# Altium PCB Robot Control Board - save.PcbDoc (part 1 of 2)
Units mm, origin at the board's own origin, x right, y up, seen from the top; angles counter-clockwise.
Board outline 113.92 x 101.47 mm, 4 copper layers (Component Side, GND, VCC, Solder Side), stack 1.6 mm thick; 77 components, 60 nets, 315 pads, 76 vias.
Unrouted connection lines stored in the file: 4.
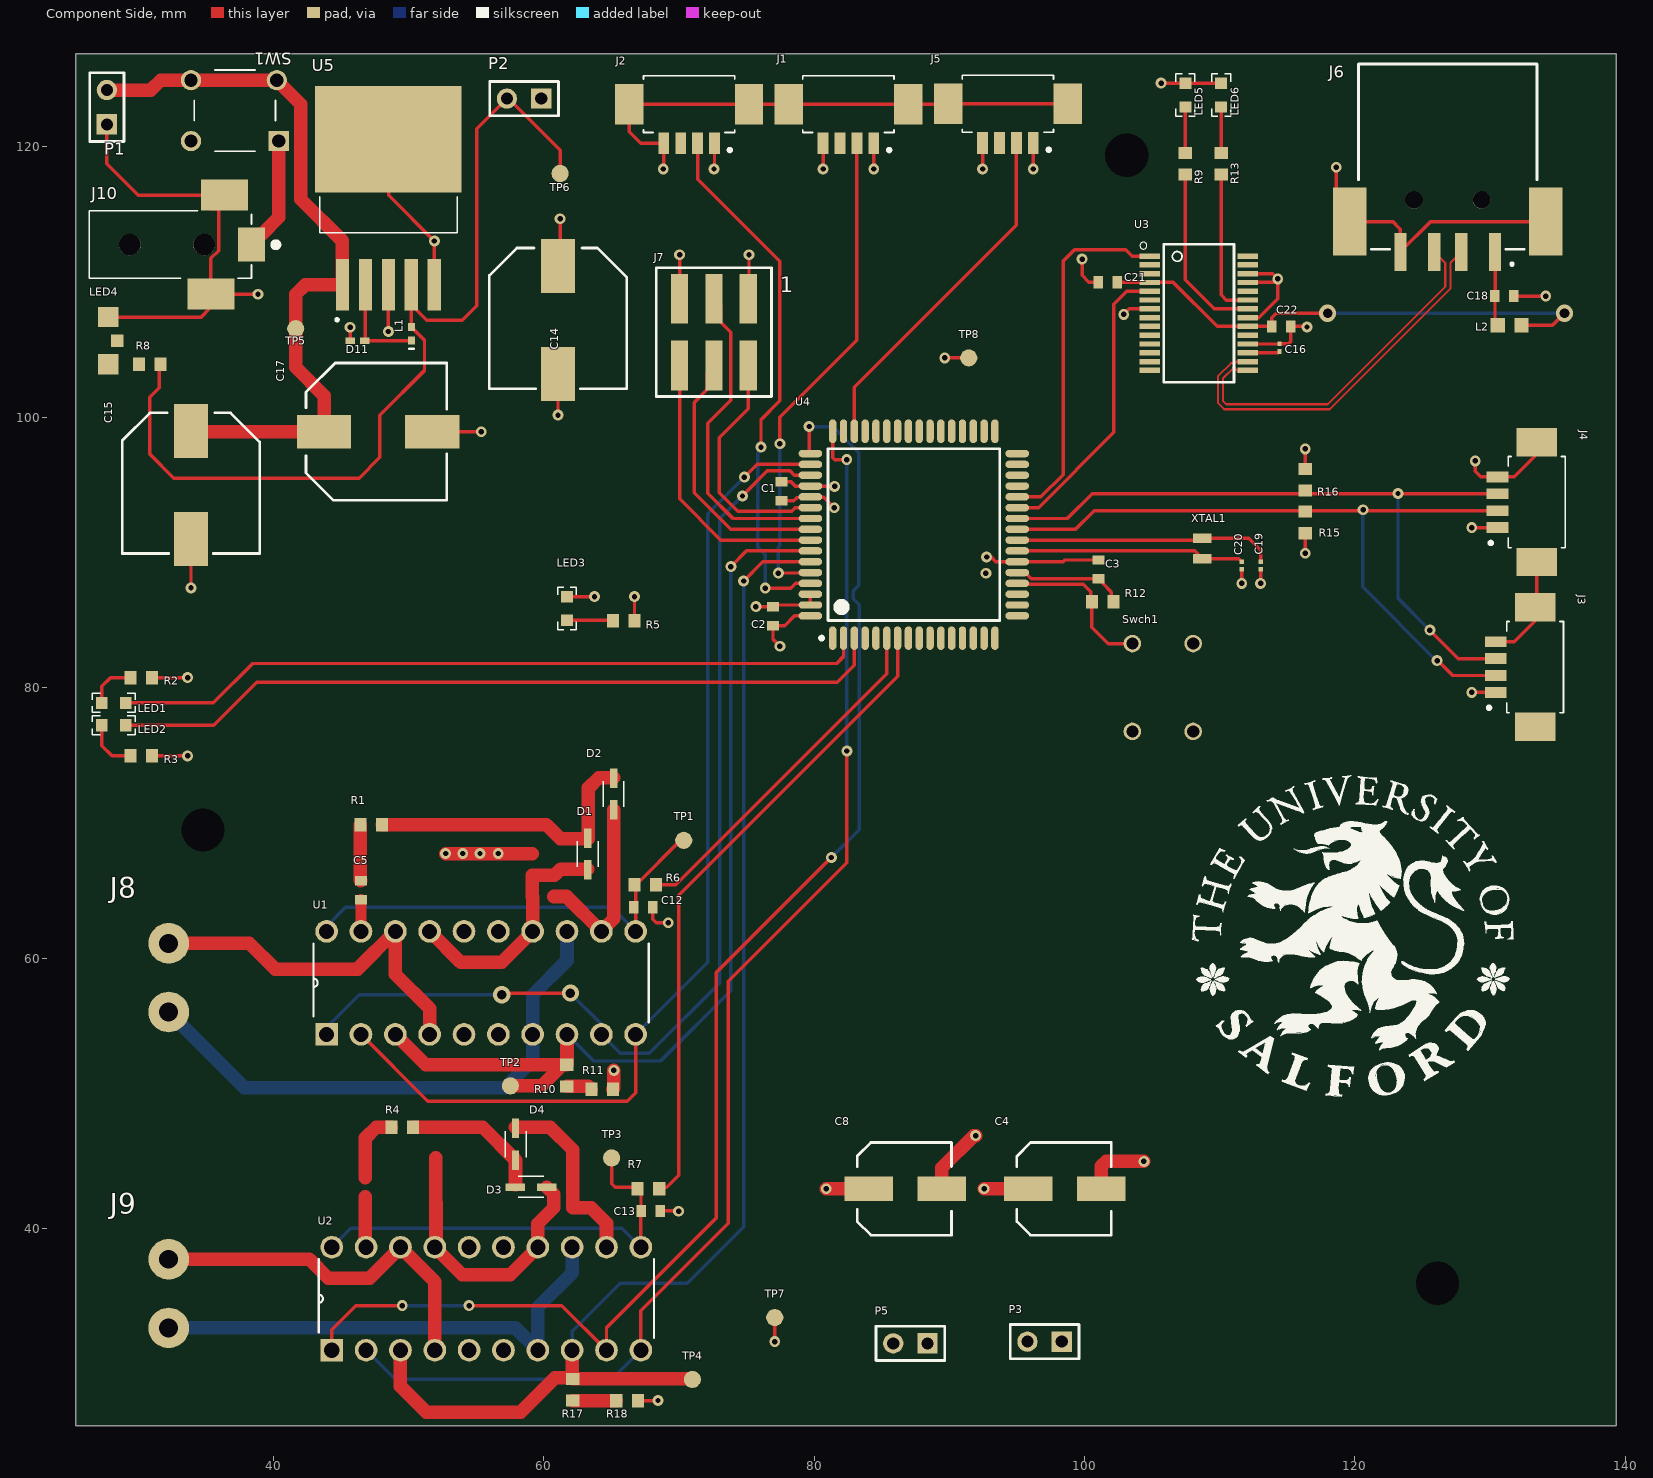
[diagram p0: Component Side view]
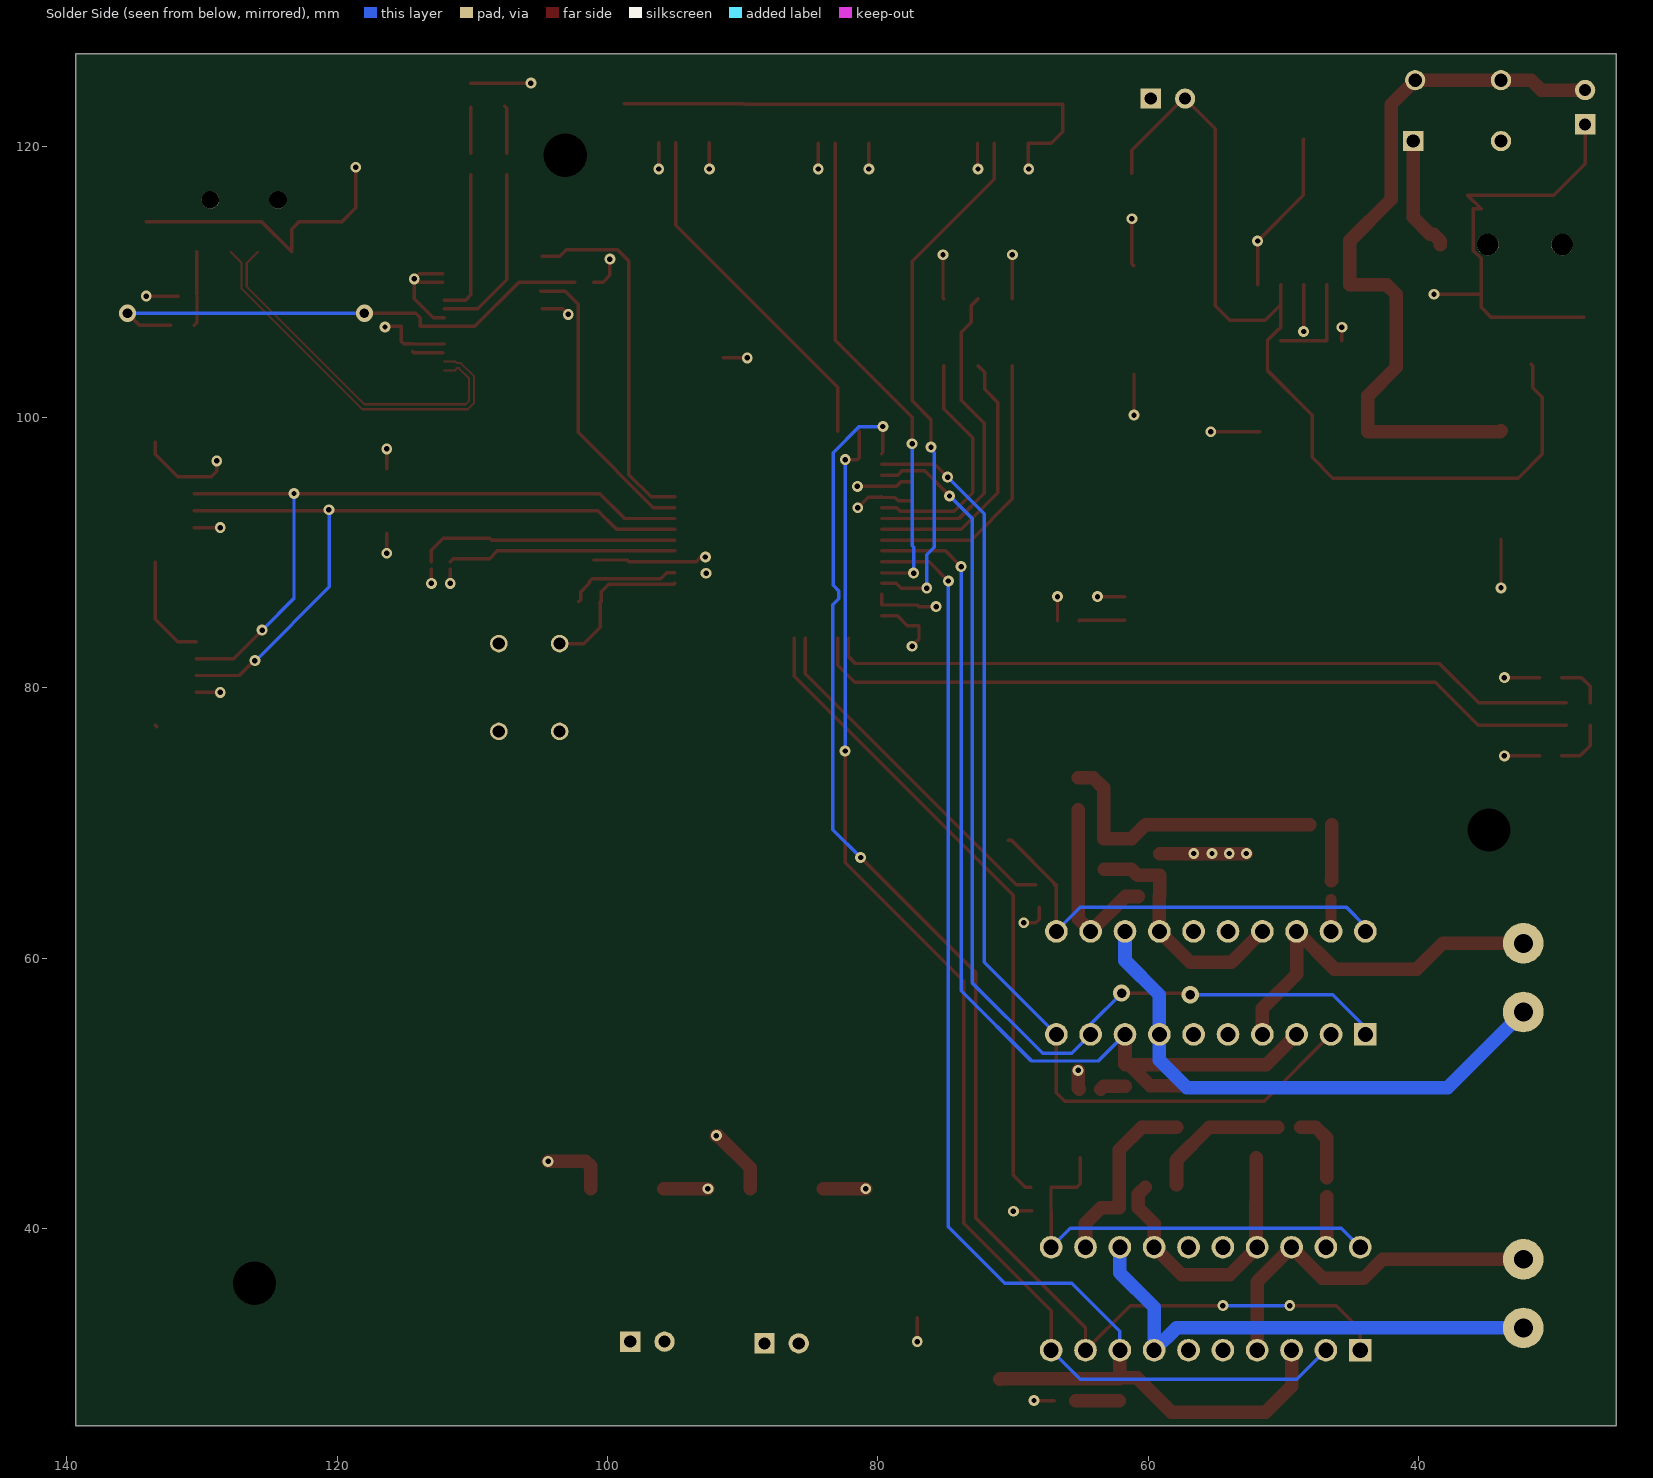
[diagram p1: Solder Side view, seen from below]
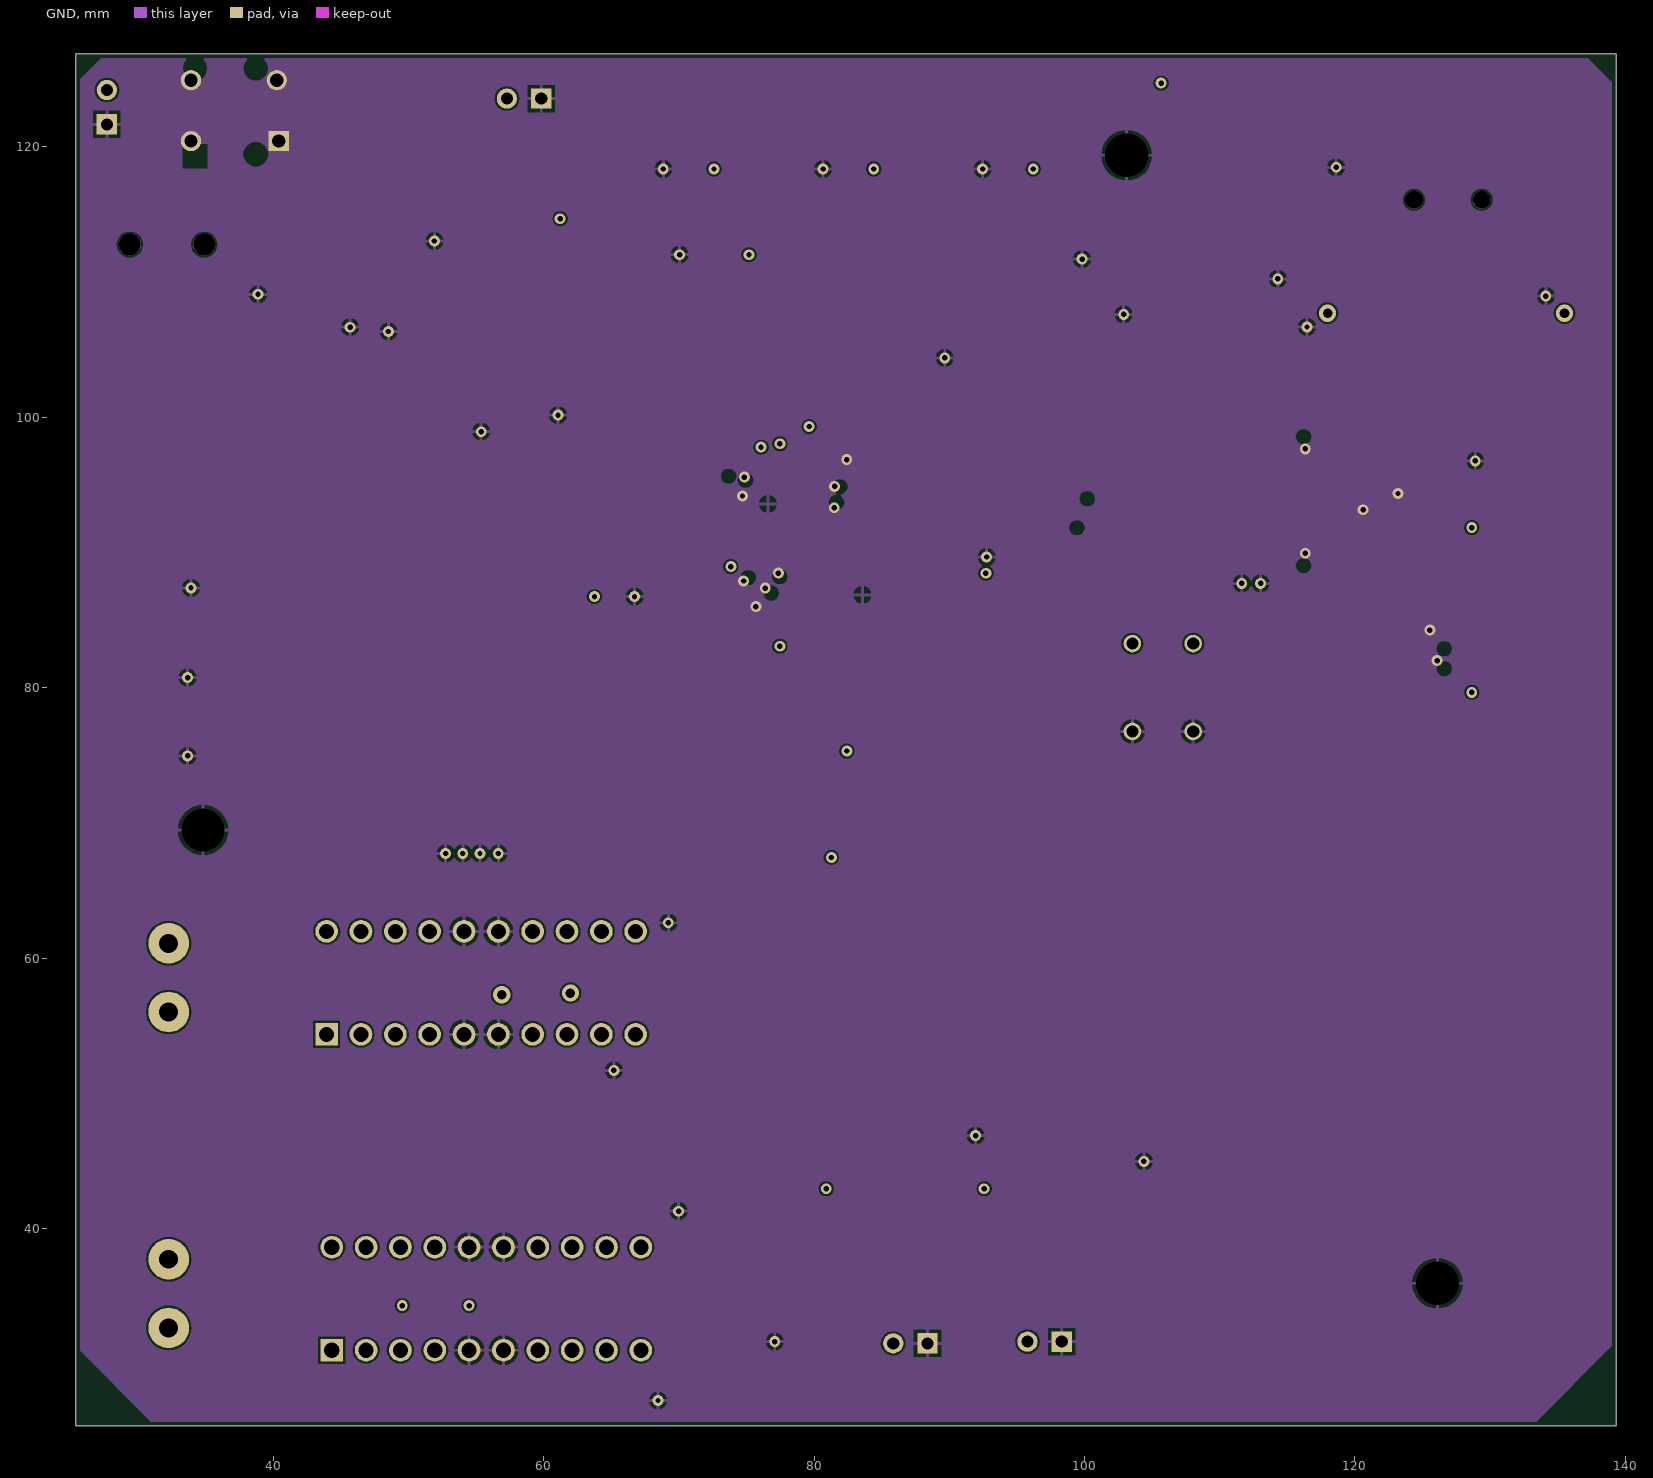
[diagram p2: GND]
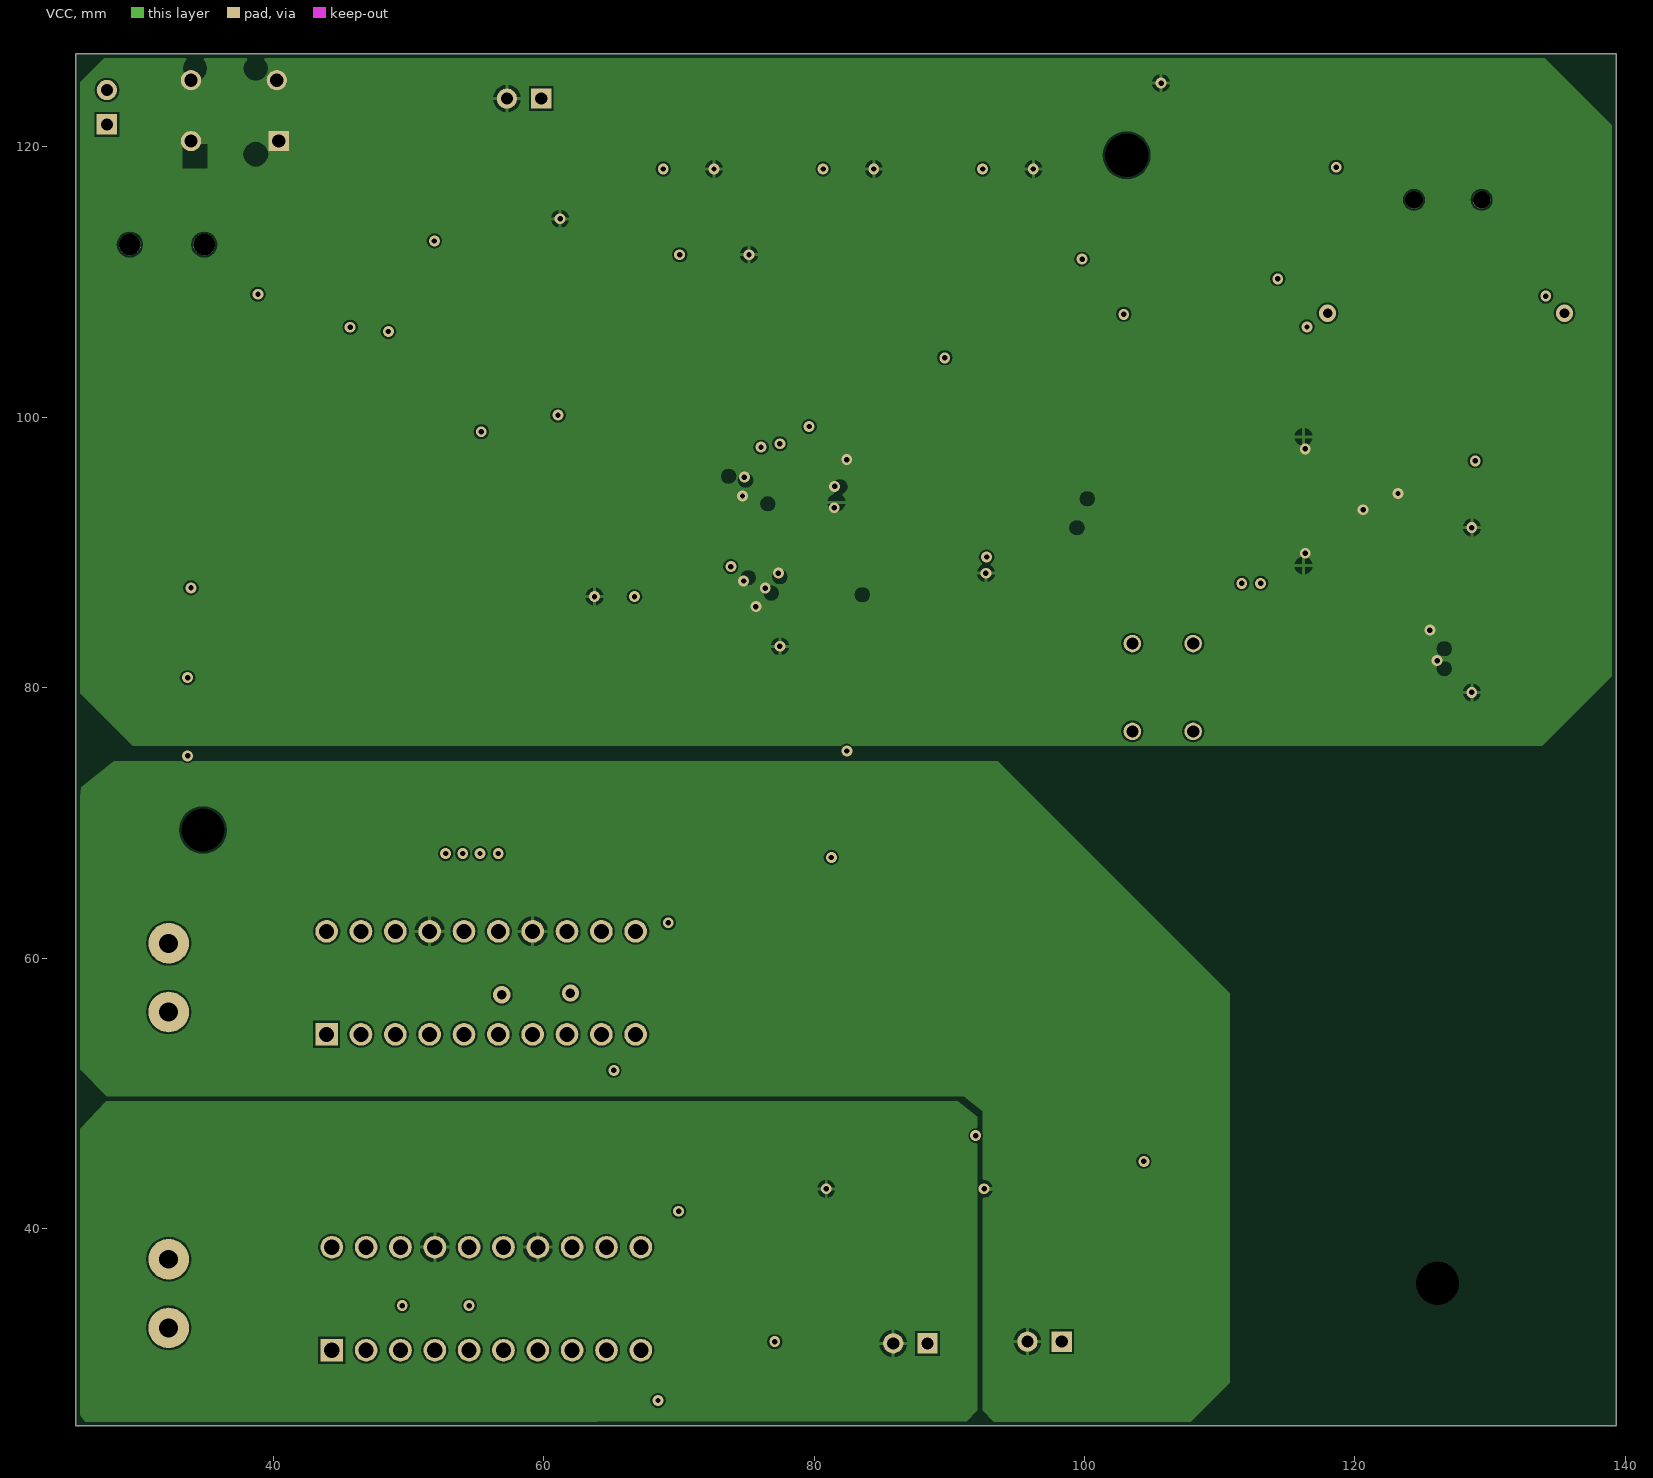
[diagram p3: VCC]
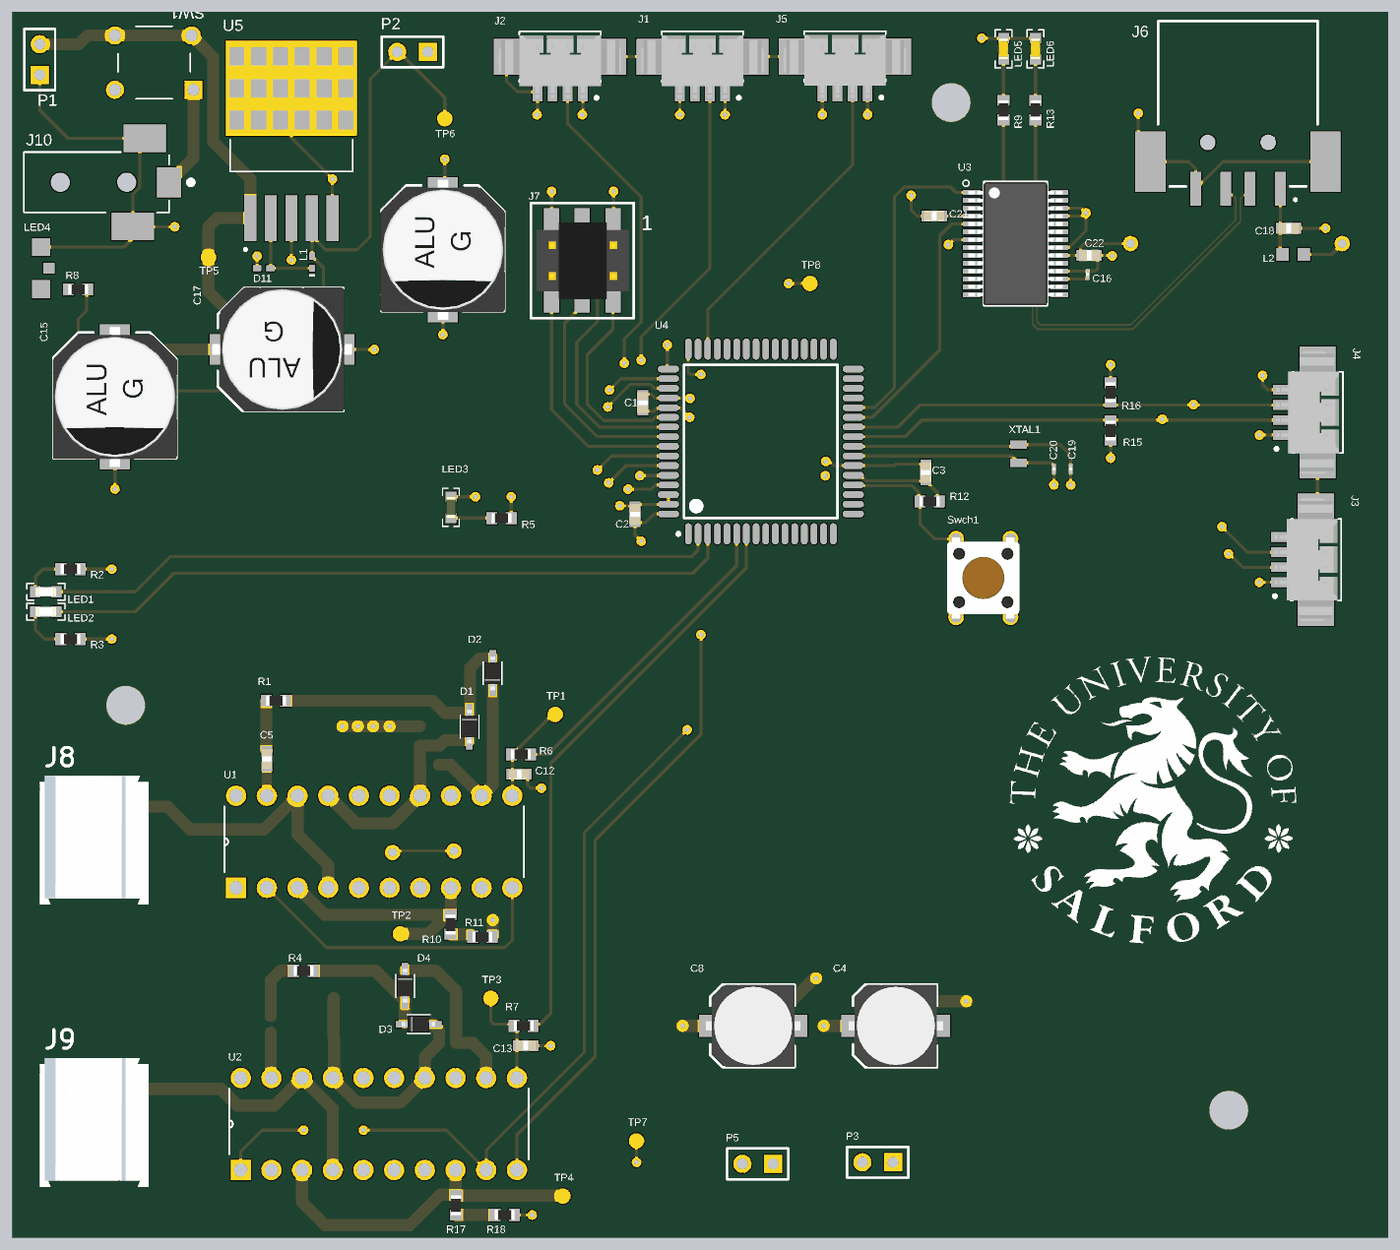
[diagram p4: 3D render of the assembled board from above, using the file's embedded part models]

## Layer stack, top to bottom
Top Solder: solder mask 0.02, Solder Resist, Dk 4
Component Side: signal copper 0.07
Dielectric 1: prepreg 0.13, Dk 4.45
GND: signal copper 0.0175
Dielectric 3: core 1.165, Dk 4.74
VCC: signal copper 0.0175
Dielectric 2: prepreg 0.13, Dk 4.45
Solder Side: signal copper 0.07
Bottom Solder: solder mask 0.02, Solder Resist, Dk 4

## Board outline
25.4,25.4 25.4,126.873 139.319,126.873 139.319,25.4

## Design rules (kind name [scope] priority, off if disabled: settings)
BoardOutlineClearance [All] p1: gap=0.3 ignorepadtopadclearanceinfootprint=FALSE
Clearance [All] p1: gap=0.15 ignorepadtopadclearanceinfootprint=FALSE
DiffPairsRouting [InDifferentialPairClass('USB')] p1: maxlimit=0.22 minlimit=0.22 mostfreqgap=0.22 toplayer_minwidth=0.154 toplayer_maxwidth=0.154 toplayer_prefwidth=0.154 midlayer1_minwidth=0.154 midlayer1_maxwidth=0.154 midlayer1_prefwidth=0.154 midlayer2_minwidth=0.154 midlayer2_maxwidth=0.154 midlayer2_prefwidth=0.154 bottomlayer_minwidth=0.154 bottomlayer_maxwidth=0.154 bottomlayer_prefwidth=0.154 maxuncoupledlength=12.7
PlaneConnect [All] p1: planeconnectstyle=Relief reliefexpansion=0.508 reliefentries=4 reliefconductorwidth=0.4 reliefairgap=0.254
PolygonConnect [All] p1: connectstyle=Relief reliefconductorwidth=0.254 reliefentries=4 polygonreliefangle="90 Angle" airgapwidth=0.254
RoutingVias [All] p1: holewidth=0.711 width=1.27 viastyle="Through Hole" minholewidth=0.711 minwidth=1.27 maxholewidth=0.711 maxwidth=1.27
SolderMaskExpansion [All] p1: expansion=0.102 istentingtop=FALSE
Width [All] p1: maxlimit=5 minlimit=0.15 preferedwidth=0.2
28 further rules are at their usual default settings.

## Classes and differential pairs
differential pair class USB: USB
component class UCU: C16 C18 C21 C22 J6 L2 LED5 LED6 R9 R13 U3
component class PSU: C14 C15 C17 D11 J J10 L1 LED4 P1 P2 R8 SW1 TP5 TP6 TP8 U5
component class MDU: C4 C5 C8 C12 C13 D1 D2 D3 D4 J8 J9 P3 P5 R1 R4 R6 R7 R10 R11 R17 R18 TP1 TP2 TP3 TP4 TP7 U1 U2
component class MCU: C1 C2 C3 C19 C20 J1 J2 J3 J4 J5 J7 LED1 LED2 LED3 R2 R3 R5 R12 R15 R16 Swch1 U4 XTAL1
differential pair USB: +USB_P -USB_N

## Components (designator, comment, footprint, x,y, rotation, side; value= is the part's Value field where it differs from the comment)
C1 "CAP" "CC0603 x 0.95mm" 77.597,94.514 r90 top value=100nF
C2 "CAP" "CC0603 x 0.95mm" 76.962,85.291 r270 top value=100nF
C3 "CAP" "CC0603 x 0.95mm" 101.027,88.743 r270 top value=100nF
C4 "Alu" UWT1V101MCL1GS 98.552,42.926 r90 top
C5 "CAP" "CC0603 x 0.87mm" 46.482,65.024 r270 top value=10nF
C8 "Alu" UWT1V101MCL1GS 86.741,42.926 r90 top
C12 "CAP" "CC0603 x 0.90mm" 67.362,63.754 r180 top value=5.6nF
C13 "CAP" "CC0603 x 0.90mm" 67.911,41.291 r180 top value=5.6nF
C14 "Alu" UUA0J471MNL1GS 61.056,107.188 r270 top
C15 "Alu" UUA0J471MNL1GS 33.909,94.996 r270 top
C16 "CAP" "CC0201 x 0.33mm" 114.427,105.156 r270 top value=100pF
C17 "Alu" UUA0J471MNL1GS 47.752,98.933 r0 top
C18 "CAP" "CC0603 x 0.95mm" 131.064,108.966 r180 top value=10nF
C19 "CAP" "CC0201 x 0.33mm" 113.03,89.034 r90 top value=22pF
C20 "CAP" "CC0201 x 0.33mm" 111.633,89.033 r90 top value=22pF
C21 "CAP" "CC0603 x 0.90mm" 101.727,109.982 r0 top value=100nF
C22 "CAP" "CC0603 x 0.95mm" 114.554,106.721 r180 top value=4.7µF
D1 "1N4148" SOD323 63.246,67.691 r270 top
D2 "1N4148" SOD323 65.187,72.136 r90 top
D3 "1N4148" SOD323 59.055,43.053 r0 top
D4 "1N4148" SOD323 57.912,46.228 r270 top
D11 "RB521S30" SOD523 46.228,105.664 r0 top
J1 "0532610471" MOLEX_0532610471 82.54,120.269 r180 top
J2 "0532610471" MOLEX_0532610471 70.759,120.269 r180 top
J3 "0532610471" MOLEX_0532610471 130.429,81.524 r90 top
J4 "0532610471" MOLEX_0532610471 130.556,93.716 r90 top
J5 "0532610471" MOLEX_0532610471 94.341,120.29 r180 top
J6 "USB-A-S-X-X-SM2" SAMTEC_USB-A-S-X-X-SM2 126.873,116.078 r180 top
J7 "SAMTEC-A-TSM-103-01-L-DVJ" SAMTEC-A-TSM-103-01-L-DV 72.594,106.299 r180 top
J8 "TERM BLOCK" 282841-2 32.258,61.087 r270 top
J9 "TERM BLOCK" 282841-2 32.258,37.719 r270 top
J10 "PJ1-022-SMT-TR" CUI_PJ1-022-SMT-TR 32.385,112.776 r0 top
L1 "Inductor" 0402-A 50.214,106.164 r90 top value=10mH
L2 "742792651" C0603K 131.445,106.807 r180 top
LED1 "Blue" "LED 0603 WHITE" 28.194,78.867 r0 top
LED2 "Blue" "LED 0603 WHITE" 28.194,77.217 r0 top
LED3 "Green" "LED 0603 GREEN" 61.722,85.859 r90 top
LED4 "KPA-3010CGCK" "KPA-3010 GREEN" 27.798,103.914 r90 top
LED5 "Orange" "LED 0603 ORANGE" 107.465,123.825 r90 top
LED6 "Orange" "LED 0603 ORANGE" 110.109,123.825 r90 top
P1 "Header 2" HDR1X2 27.686,121.666 r90 top
P2 "Header 2" HDR1X2 59.817,123.571 r180 top
P3 "Header 2" HDR1X2 98.321,31.623 r180 top
P5 "Header 2" HDR1X2 88.392,31.496 r180 top
R1 "RES" RESC0603_N 47.244,69.85 r180 top value=100
R2 "RES" RESC0603_N 30.226,80.742 r180 top value=150
R3 "RES" RESC0603_N 30.226,74.952 r180 top value=150
R4 "RES" RESC0603_N 49.53,47.48 r180 top value=100
R5 "RES" RESC0603_N 65.913,84.963 r180 top value=270
R6 "RES" RESC0603_N 67.514,65.405 r0 top value=100K
R7 "RES" RESC0603_N 67.743,42.926 r0 top value=100K
R8 "RES" RESC0603_N 30.861,103.914 r0 top value=270
R9 "RES" RESC0603_N 107.465,118.745 r90 top value=270
R10 "RES" RESC0603_N 61.687,51.308 r90 top value=0.15
R11 "RES" RESC0603_N 64.323,50.292 r180 top value=0.15
R12 "RES" RESC0603_N 101.346,86.344 r0 top value=130
R13 "RES" RESC0603_N 110.109,118.745 r90 top value=270
R15 "RES" RESC0603_N 116.332,92.222 r270 top value=1.60K
R16 "RES" RESC0603_N 116.332,95.377 r90 top value=1.60K
R17 "RES" RESC0603_N 62.142,28.067 r90 top value=0.15
R18 "RES" RESC0603_N 66.167,27.267 r180 top value=0.15
SW1 "3-1825910-1" TE_3-1825910-1 37.159,122.682 r180 top
Swch1 "Tactile Switch" "Tactile Switch - 1825910_6" 105.791,80.01 r90 top
TP1 "TEST_POINT_1.27mm" Test_Point1.27mm 70.358,68.707 r90 top
TP2 "TEST_POINT_1.27mm" Test_Point1.27mm 57.531,50.546 r90 top
TP3 "TEST_POINT_1.27mm" Test_Point1.27mm 65.024,45.212 r90 top
TP4 "TEST_POINT_1.27mm" Test_Point1.27mm 70.993,28.829 r90 top
TP5 "TEST_POINT_1.27mm" Test_Point1.27mm 41.656,106.553 r90 top
TP6 "TEST_POINT_1.27mm" Test_Point1.27mm 61.214,118.033 r90 top
TP7 "TEST_POINT_1.27mm" Test_Point1.27mm 77.089,33.401 r90 top
TP8 "TEST_POINT_1.27mm" Test_Point1.27mm 91.44,104.394 r90 top
U1 "L6205N" DIP254P762X510-20 66.802,61.976 r90 top
U2 "L6205N" DIP254P762X510-20 67.183,38.608 r90 top
U3 "FT232RL-REEL" SOP65P780X200-28N 108.458,107.696 r0 top
U4 "ATmega128A-AU" 64A_N 87.376,91.313 r90 top
U5 "LM2596S-5.0" TO170P1524X483-6N 48.514,116.209 r90 top
XTAL1 "Crystal FC12M" PCBComponent_1 108.712,90.297 r90 top

## Footprints (in the part's own frame and the unit in brackets; to place one, negate y for a bottom-side part, rotate by r counter-clockwise, add the part's x,y. Pads: shape width x height; smd on the part's side, far side on the other; paste and mask are expansions set on the pad)
64A_N [mm] "Thin QFP, 64-Leads, Body 14x14mm, Pitch 0.8mm, IPC Medium Density"
  oval 1.75x0.55 smd: 1(-7.65,6) 2(-7.65,5.2) 3(-7.65,4.4) 4(-7.65,3.6) 5(-7.65,2.8) 6(-7.65,2) 7(-7.65,1.2) 8(-7.65,0.4) 9(-7.65,-0.4) 10(-7.65,-1.2) 11(-7.65,-2) 12(-7.65,-2.8) 13(-7.65,-3.6) 14(-7.65,-4.4) 15(-7.65,-5.2) 16(-7.65,-6) 33(7.65,-6) 34(7.65,-5.2) 35(7.65,-4.4) 36(7.65,-3.6) 37(7.65,-2.8) 38(7.65,-2) 39(7.65,-1.2) 40(7.65,-0.4) 41(7.65,0.4) 42(7.65,1.2) 43(7.65,2) 44(7.65,2.8) 45(7.65,3.6) 46(7.65,4.4) 47(7.65,5.2) 48(7.65,6)
  oval 0.55x1.75 smd: 17(-6,-7.65) 18(-5.2,-7.65) 19(-4.4,-7.65) 20(-3.6,-7.65) 21(-2.8,-7.65) 22(-2,-7.65) 23(-1.2,-7.65) 24(-0.4,-7.65) 25(0.4,-7.65) 26(1.2,-7.65) 27(2,-7.65) 28(2.8,-7.65) 29(3.6,-7.65) 30(4.4,-7.65) 31(5.2,-7.65) 32(6,-7.65) 49(6,7.65) 50(5.2,7.65) 51(4.4,7.65) 52(3.6,7.65) 53(2.8,7.65) 54(2,7.65) 55(1.2,7.65) 56(0.4,7.65) 57(-0.4,7.65) 58(-1.2,7.65) 59(-2,7.65) 60(-2.8,7.65) 61(-3.6,7.65) 62(-4.4,7.65) 63(-5.2,7.65) 64(-6,7.65)
  silkscreen extent -7.77,-6.35 6.35,6.95, body extent -7,-7 7,7, height 1.2
0402-A [mm] "Chip Inductor, Body 1.0x0.5mm, IPC High Density"
  rect 0.6x0.5 smd: 1(-0.5,0) 2(0.5,0)
  silkscreen extent -1.1,-0.15 -1.1,0.15, body extent -0.55,-0.3 0.55,0.3, height 0.55
282841-2 [mm] "TERM BLOCK 2POS SIDE ENT 5.08MM"
  round 3 hole 1.4: 1(0,0) 2(5.08,0)
  body extent -2.54,-4.57 8.12,4.43, height 15.2
C0603K [mm]
  rect 1.05x1.08 smd: 1(-0.875,0) 2(0.875,0)
"CC0201 x 0.33mm" [mm] "CC0201 0.33 max Thickness"
  rect 0.36x0.32 smd mask+0.025: 1(-0.28,0) 2(0.28,0)
  body extent -0.31,-0.16 0.32,0.17, height 0.32
"CC0603 x 0.87mm" [mm] "CC0603 0.87 max Thickness"
  rect 0.7x0.9 smd: 1(-0.7,0) 2(0.7,0)
  body extent -0.85,-0.45 0.85,0.45, height 0.86
"CC0603 x 0.90mm" [mm] "CC0603 0.90 max Thickness"
  rect 0.7x0.9 smd: 1(-0.7,0) 2(0.7,0)
  body extent -0.85,-0.45 0.85,0.45, height 0.89
"CC0603 x 0.95mm" [mm] "CC0603 0.95 max Thickness"
  rect 0.7x0.9 smd: 1(-0.7,0) 2(0.7,0)
  body extent -0.87,-0.47 0.88,0.48, height 0.94
CUI_PJ1-022-SMT-TR [mm]
  rect 2x2.5 smd: 1(6,0)
  rect 3.5x2.3 smd: 2(3,-3.65) 3(4,3.65)
  round 1.6 hole 1.6 unplated: ""(-3,0) ""(2.5,0)
  silkscreen extent -6,-2.5 8,2.5
DIP254P762X510-20 [mil]
  rect 66x66 hole 44: 1(-300,900)
  round 66 hole 44: 2(-300,800) 3(-300,700) 4(-300,600) 5(-300,500) 6(-300,400) 7(-300,300) 8(-300,200) 9(-300,100) 10(-300,0) 11(0,0) 12(0,100) 13(0,200) 14(0,300) 15(0,400) 16(0,500) 17(0,600) 18(0,700) 19(0,800) 20(0,900)
  silkscreen extent -265,-38 -35,938
HDR1X2 [mm] "Connector; Header; 2 Position"
  rect 1.5x1.5 hole 0.9: 1(0,0)
  round 1.5 hole 0.9: 2(2.54,0)
  silkscreen extent -1.27,-1.27 3.81,1.27
"KPA-3010 GREEN" [mm] "3.0x2x1mm Right Angle LED"
  rect 1.5x1.5 smd: 1(3.5,0) 2(0,0)
  rect 0.9x0.9 smd: 3(1.75,-0.65)
  body extent 0.25,-0.48 3.25,1.38, height 1
"LED 0603 GREEN" [mm] "0603 CHIP-LED"
  rect 0.85x0.9 smd: 1(-0.875,0) 2(0.875,0)
  silkscreen extent -1.58,-0.7 1.58,0.7, body extent -0.85,-0.4 0.85,0.4, height 0.65
"LED 0603 ORANGE" [mm] "0603 CHIP-LED"
  rect 0.85x0.9 smd: 1(-0.875,0) 2(0.875,0)
  silkscreen extent -1.58,-0.7 1.58,0.7, body extent -0.85,-0.4 0.85,0.4, height 0.65
"LED 0603 WHITE" [mm] "0603 CHIP-LED"
  rect 0.85x0.9 smd: 1(-0.875,0) 2(0.875,0)
  silkscreen extent -1.58,-0.7 1.58,0.7, body extent -0.85,-0.4 0.85,0.4, height 0.65
MOLEX_0532610471 [mm]
  rect 0.8x1.6 smd: 1(-1.875,0) 2(-0.625,0) 3(0.625,0) 4(1.875,0)
  rect 2.1x3 smd: S1(-4.425,-2.9) S2(4.425,-2.9)
  silkscreen extent -3.37,-5 3.37,0.62, body extent -5.08,-4.68 5.07,0.52, height 3.35
PCBComponent_1 [mm]
  rect 0.7x1.4 smd: 1(-0.75,0) 2(0.75,0)
RESC0603_N [mm] "Chip Resistor, Body 1.6x0.8mm, IPC Medium Density"
  rect 0.9x1 smd: 1(-0.8,0) 2(0.8,0)
  body extent -0.82,-0.42 0.82,0.42, height 0.5
SAMTEC-A-TSM-103-01-L-DV [mm]
  rect 1.27x3.68 smd: 1(-2.54,-2.476) 2(-2.54,2.476) 3(0,-2.476) 4(0,2.476) 5(2.54,-2.476) 6(2.54,2.476)
  silkscreen extent -4.26,-4.77 4.26,4.77, body extent -3.85,-3.83 3.77,3.87, height 9.65
SAMTEC_USB-A-S-X-X-SM2 [mm]
  rrect4% 0.9x2.8 smd: 01(-3.5,3.85) 02(-1,3.85) 03(1,3.85) 04(3.5,3.85)
  rect 2.5x5 smd: S1(-7.25,1.6) S2(7.25,1.6)
  round 1.3 hole 1.3 unplated: ""(-2.5,0) ""(2.5,0)
  silkscreen extent -6.6,-10.05 6.6,4.85
SOD323 [mm] "SOD-323/SC-76; 2 Leads; Body 1.7 x 1.3 mm, (LxW)"
  rect 1.45x0.55 smd: 1(1.175,0) 2(-1.175,0)
  silkscreen extent -0.95,-0.75 0.95,0.8, body extent -1.42,-0.66 1.38,0.69, height 1.15
SOD523 [mm]
  rect 0.7x0.5 smd: 1(0.55,0) 2(-0.55,0)
SOP65P780X200-28N [mm]
  rect 1.5x0.4 smd: 1(-3.625,4.225) 2(-3.625,3.575) 3(-3.625,2.925) 4(-3.625,2.275) 5(-3.625,1.625) 6(-3.625,0.975) 7(-3.625,0.325) 8(-3.625,-0.325) 9(-3.625,-0.975) 10(-3.625,-1.625) 11(-3.625,-2.275) 12(-3.625,-2.925) 13(-3.625,-3.575) 14(-3.625,-4.225) 15(3.625,-4.225) 16(3.625,-3.575) 17(3.625,-2.925) 18(3.625,-2.275) 19(3.625,-1.625) 20(3.625,-0.975) 21(3.625,-0.325) 22(3.625,0.325) 23(3.625,0.975) 24(3.625,1.625) 25(3.625,2.275) 26(3.625,2.925) 27(3.625,3.575) 28(3.625,4.225)
  silkscreen extent -4.35,-5.1 2.6,5.25, body extent -3.9,-5.1 3.9,5.1, height 2
"Tactile Switch - 1825910_6" [mm]
  round 1.3 hole 0.9: 1(3.25,2.25) 2(3.25,-2.25) 3(-3.25,2.25) 4(-3.25,-2.25)
  body extent -3.9,-2.99 3.9,3, height 5
TE_3-1825910-1 [mm]
  rect 1.498x1.498 hole 0.99: 1(-3.25,2.25)
  round 1.498 hole 0.99: 2(3.25,2.25) 3(-3.1,-2.25) 4(3.25,-2.25)
  silkscreen extent -3,-3 3,3
Test_Point1.27mm [mm]
  round 1.27 smd paste-2: 1(0,0)
  body extent -0.63,-0.63 0.64,0.63, height 0.01
TO170P1524X483-6N [mm]
  rect 3.79x0.99 smd: 1(-6.4,3.4) 2(-6.4,1.7) 3(-6.4,0) 4(-6.4,-1.7) 5(-6.4,-3.4)
  rect 7.88x10.84 smd paste-6: 6(4.35,0)
  silkscreen extent -9.1,-5.08 0.09,5.08
UUA0J471MNL1GS [mm] "Aluminum Electrolytic Capacitor, Body 10.30x10.30x10mm, IPC High Density"
  rect 4x2.5 smd: 1(-4,0) 2(4,0)
  silkscreen extent -5.33,-5.08 5.08,5.08, body extent -5.8,-5.15 5.8,5.15, height 10.2
UWT1V101MCL1GS [mm]
  rect 1.8x3.6 smd: 1(0,2.7) 2(0,-2.7)
  silkscreen extent -3.43,-3.43 3.43,3.56, body extent -3.4,-3.9 3.4,3.9, height 8.05

## Part data
C1 C2 C3: library part CS0603KRX7R0BB104, "0.1µF ±10% 100V Ceramic Capacitor X7R 0603 (1608 Metric)", Capacitance=0.1µF, Digi-Key Part Number=311-3555-2-ND, manufacturer=Yageo, Manufacturer Standard Lead Time="17 Weeks", Normalized value µF=0.1, Operating Temperature="-55°C ~ 125°C", Package / Case="0603 (1608 Metric)", Package Inch=0603, Package Metric=1608, Ratings=-, Temperature Coefficient=X7R, Tolerance=±10%, Voltage - Rated=100V, Applications="Boardflex Sensitive", ComponentLink1URL=http://www.yageo.com/NewPortal/yageodocoutput?fileName=/pdf/MLCC/UPY-ST_NPOX7R_16V-to-3KV_5.pdf, currency=USD, Failure Rate=-, Features="Soft Termination", Height - Seated (Max)=-, idx=2943, Lead Free Status / RoHS Status="Lead free / ROHS3 Compliant", Lead Spacing=-, Lead Style=-, Length Inch=0.063, Length mm=1.60, Moisture Sensitivity Level (MSL)="1  (Unlimited)", Mounting Type="Surface Mount, MLCC", Packaging="Tape & Reel (TR)", Part Number=CS0603KRX7R0BB104, Part Status=Active, ProductLink=https://www.digikey.com/product-detail/en/yageo/CS0603KRX7R0BB104/311-3555-2-ND/6097976, Series=CS, Size / Dimension="0.063\" L x 0.031\" W (1.60mm x 0.80mm)", Thickness (Max)="0.037\" (0.95mm)", Thickness Inch=0.037, Thickness mm=0.95, Width Inch=0.031, Width mm=0.80
C4 C8: library part UWT1V101MCL1GS, "CAP ALUM 100UF 20% 35V SMD", Avnet Part Number=NCHUWT1V101MCL1GS, Capacitance=100µF, manufacturer=Nichicon, Voltage=35V, currency=EUR, MOQ=18000, Part Number=UWT1V101MCL1GS, Price=0.0452
C5: library part C0603C103G8GAC7867, "10000pF ±2% 10V Ceramic Capacitor C0G, NP0 0603 (1608 Metric)", Capacitance=10000pF, Digi-Key Part Number=399-14481-2-ND, manufacturer=KEMET, Manufacturer Standard Lead Time="54 Weeks", Normalized value µF=0.01, Operating Temperature="-55°C ~ 125°C", Package / Case="0603 (1608 Metric)", Package Inch=0603, Package Metric=1608, Ratings=-, Temperature Coefficient="C0G, NP0", Tolerance=±2%, Voltage - Rated=10V, Applications="General Purpose", ComponentLink1URL=https://api.kemet.com/component-edge/download/datasheet/C0603C103G8GACTU.pdf, currency=USD, Failure Rate=-, Features="Low ESL", Height - Seated (Max)=-, idx=6156, Lead Free Status / RoHS Status="Lead free / ROHS3 Compliant", Lead Spacing=-, Lead Style=-, Length Inch=0.063, Length mm=1.60, Moisture Sensitivity Level (MSL)="1  (Unlimited)", Mounting Type="Surface Mount, MLCC", Packaging="Tape & Reel (TR)", Part Number=C0603C103G8GAC7867, Part Status=Active, ProductLink=https://www.digikey.com/product-detail/en/kemet/C0603C103G8GAC7867/399-14481-2-ND/2199740, Series="SMD Comm C0G", Size / Dimension="0.063\" L x 0.031\" W (1.60mm x 0.80mm)", Thickness (Max)="0.034\" (0.87mm)", Thickness Inch=0.034, Thickness mm=0.87, Width Inch=0.031, Width mm=0.80
C12 C13: library part CC0603JRX7R9BB562, "5600pF ±5% 50V Ceramic Capacitor X7R 0603 (1608 Metric)", Capacitance=5600pF, Digi-Key Part Number=311-4021-2-ND, manufacturer=Yageo, Manufacturer Standard Lead Time="17 Weeks", Normalized value µF=0.0056, Operating Temperature="-55°C ~ 125°C", Package / Case="0603 (1608 Metric)", Package Inch=0603, Package Metric=1608, Ratings=-, Temperature Coefficient=X7R, Tolerance=±5%, Voltage - Rated=50V, Applications="General Purpose", ComponentLink1URL=https://www.yageo.com/upload/media/product/productsearch/datasheet/mlcc/UPY-GPHC_X7R_6.3V-to-50V_18.pdf, currency=USD, Failure Rate=-, Features=-, Height - Seated (Max)=-, idx=31442, Lead Free Status / RoHS Status="Lead free / ROHS3 Compliant", Lead Spacing=-, Lead Style=-, Length Inch=0.063, Length mm=1.60, Moisture Sensitivity Level (MSL)="1  (Unlimited)", Mounting Type="Surface Mount, MLCC", Packaging="Tape & Reel (TR)", Part Number=CC0603JRX7R9BB562, Part Status=Active, ProductLink=https://www.digikey.com/product-detail/en/yageo/CC0603JRX7R9BB562/311-4021-2-ND/5883696, Series=CC, Size / Dimension="0.063\" L x 0.031\" W (1.60mm x 0.80mm)", Thickness (Max)="0.035\" (0.90mm)", Thickness Inch=0.035, Thickness mm=0.90, Width Inch=0.031, Width mm=0.80
C14 C15 C17: library part UUA1E221MNL1GS, "CAP ALUM 220UF 20% 25V SMD", Capacitance=220uF, Case/Package=Radial, Leakage Current=55uA, manufacturer=Nichicon, Max Operating Temperature=105°C, Package Quantity=1, Ripple Current=320mA, Supplier Part Number 1=493-9451-1-ND, Tolerance=20%, Voltage Rating=25V, ComponentLink1Description=https://datasheet.ciiva.com/15036/e-ua-15036879.pdf?src-supplier=Digi-Key, ComponentLink1URL=https://datasheet.ciiva.com/15036/e-ua-15036879.pdf?src-supplier=Digi-Key, Features="General Purpose", Height - Seated (Max)=0.394inch, Length=10mm, Life (Hours)=5000Hour, Mount="Surface Mount", Packaging="Tape and Reel", Part Number=UUA1E221MNL1GS, Pricing 1="1=0,91000, 10=0,69200, 100=0,49490 (USD)", RoHS=Yes, Stock 1=716, Supplier 1=Digi-Key, Termination=SMD/SMT, Voltage Rating (DC)=25V
C16: library part GRM0335C1H101GA01D, "100pF ±2% 50V Ceramic Capacitor C0G, NP0 0201 (0603 Metric)", Capacitance=100pF, Digi-Key Part Number=490-7751-2-ND, manufacturer="Murata Electronics", Manufacturer Standard Lead Time="11 Weeks", Normalized value µF=0.0001, Operating Temperature="-55°C ~ 125°C", Package / Case="0201 (0603 Metric)", Package Inch=0201, Package Metric=0603, Ratings=-, Temperature Coefficient="C0G, NP0", Tolerance=±2%, Voltage - Rated=50V, Applications="General Purpose", ComponentLink1Description=Datasheet, ComponentLink1URL=https://search.murata.co.jp/Ceramy/image/img/A01X/G101/ENG/GRM0335C1H101GA01-01.pdf, currency=USD, Features=-, Height - Seated (Max)=-, idx=118, Lead Free Status / RoHS Status="Lead free / ROHS3 Compliant", Lead Spacing=-, Lead Style=-, Length Inch=0.024, Length mm=0.60, Moisture Sensitivity Level (MSL)="1  (Unlimited)", Mounting Type="Surface Mount, MLCC", Packaging="Tape & Reel (TR)", Part Number=GRM0335C1H101GA01D, Part Status=Active, ProductLink=https://www.digikey.com/product-detail/en/murata-electronics/GRM0335C1H101GA01D/490-7751-2-ND/4358135, Series=GRM, Size / Dimension="0.024\" L x 0.012\" W (0.60mm x 0.30mm)", Thickness (Max)="0.013\" (0.33mm)", Thickness Inch=0.013, Thickness mm=0.33, Width Inch=0.012, Width mm=0.30
C18: library part CS0603KRX7R7BB103, "10000pF ±10% 16V Ceramic Capacitor X7R 0603 (1608 Metric)", Capacitance=10000pF, Digi-Key Part Number=CS0603KRX7R7BB103-ND, manufacturer=Yageo, Manufacturer Standard Lead Time="17 Weeks", Normalized value µF=0.01, Operating Temperature="-55°C ~ 125°C", Package / Case="0603 (1608 Metric)", Package Inch=0603, Package Metric=1608, Ratings=-, Temperature Coefficient=X7R, Tolerance=±10%, Voltage - Rated=16V, Applications="Boardflex Sensitive", ComponentLink1URL=http://www.yageo.com/NewPortal/yageodocoutput?fileName=/pdf/MLCC/UPY-ST_NPOX7R_16V-to-3KV_5.pdf, currency=USD, Failure Rate=-, Features="Soft Termination", Height - Seated (Max)=-, idx=48811, Lead Free Status / RoHS Status="Lead free / ROHS3 Compliant", Lead Spacing=-, Lead Style=-, Length Inch=0.063, Length mm=1.60, Moisture Sensitivity Level (MSL)="1  (Unlimited)", Mounting Type="Surface Mount, MLCC", Packaging="Tape & Reel (TR)", Part Number=CS0603KRX7R7BB103, Part Status=Active, ProductLink=https://www.digikey.com/product-detail/en/yageo/CS0603KRX7R7BB103/CS0603KRX7R7BB103-ND/6097905, Series=CS, Size / Dimension="0.063\" L x 0.031\" W (1.60mm x 0.80mm)", Thickness (Max)="0.037\" (0.95mm)", Thickness Inch=0.037, Thickness mm=0.95, Width Inch=0.031, Width mm=0.80
C19 C20: library part CC0201GRNPO9BN220, "22pF ±2% 50V Ceramic Capacitor C0G, NP0 0201 (0603 Metric)", Capacitance=22pF, Digi-Key Part Number=311-3681-2-ND, manufacturer=Yageo, Manufacturer Standard Lead Time="17 Weeks", Normalized value µF=2.2E-5, Operating Temperature="-55°C ~ 125°C", Package / Case="0201 (0603 Metric)", Package Inch=0201, Package Metric=0603, Ratings=-, Temperature Coefficient="C0G, NP0", Tolerance=±2%, Voltage - Rated=50V, Applications="General Purpose", ComponentLink1Description=Datasheet, ComponentLink1URL=https://www.yageo.com/upload/media/product/productsearch/datasheet/mlcc/UPY-GP_NP0_16V-to-50V_17.pdf, currency=USD, Failure Rate=-, Features=-, Height - Seated (Max)=-, idx=21136, Lead Free Status / RoHS Status="Lead free / ROHS3 Compliant", Lead Spacing=-, Lead Style=-, Length Inch=0.024, Length mm=0.60, Moisture Sensitivity Level (MSL)="1  (Unlimited)", Mounting Type="Surface Mount, MLCC", Packaging="Tape & Reel (TR)", Part Number=CC0201GRNPO9BN220, Part Status=Active, ProductLink=https://www.digikey.com/product-detail/en/yageo/CC0201GRNPO9BN220/311-3681-2-ND/5883130, Series=CC, Size / Dimension="0.024\" L x 0.012\" W (0.60mm x 0.30mm)", Thickness (Max)="0.013\" (0.33mm)", Thickness Inch=0.013, Thickness mm=0.33, Width Inch=0.012, Width mm=0.30
C21: library part CC0603KRX7R7BB104, "0.1µF ±10% 16V Ceramic Capacitor X7R 0603 (1608 Metric)", Capacitance=0.1µF, Digi-Key Part Number=311-1088-2-ND, manufacturer=Yageo, Manufacturer Standard Lead Time="16 Weeks", Normalized value µF=0.1, Operating Temperature="-55°C ~ 125°C", Package / Case="0603 (1608 Metric)", Package Inch=0603, Package Metric=1608, Ratings=-, Temperature Coefficient=X7R, Tolerance=±10%, Voltage - Rated=16V, Applications="General Purpose", ComponentLink1URL=https://www.yageo.com/upload/media/product/productsearch/datasheet/mlcc/UPY-GPHC_X7R_6.3V-to-50V_18.pdf, currency=USD, Failure Rate=-, Features=-, Height - Seated (Max)=-, idx=766, Lead Free Status / RoHS Status="Lead free / ROHS3 Compliant", Lead Spacing=-, Lead Style=-, Length Inch=0.063, Length mm=1.60, Moisture Sensitivity Level (MSL)="1  (Unlimited)", Mounting Type="Surface Mount, MLCC", Packaging="Tape & Reel (TR)", Part Number=CC0603KRX7R7BB104, Part Status=Active, ProductLink=https://www.digikey.com/product-detail/en/yageo/CC0603KRX7R7BB104/311-1088-2-ND/302822, Series=CC, Size / Dimension="0.063\" L x 0.031\" W (1.60mm x 0.80mm)", Thickness (Max)="0.035\" (0.90mm)", Thickness Inch=0.035, Thickness mm=0.90, Width Inch=0.031, Width mm=0.80
C22: library part CC0603KRX5R7BB475, "4.7µF ±10% 16V Ceramic Capacitor X5R 0603 (1608 Metric)", Capacitance=4.7µF, Digi-Key Part Number=311-1785-2-ND, manufacturer=Yageo, Normalized value µF=4.7, Operating Temperature="-55°C ~ 85°C", Package / Case="0603 (1608 Metric)", Package Inch=0603, Package Metric=1608, Ratings=-, Temperature Coefficient=X5R, Tolerance=±10%, Voltage - Rated=16V, Applications="General Purpose", ComponentLink1URL=https://www.yageo.com/upload/media/product/productsearch/datasheet/mlcc/UPY-GPHC_X5R_4V-to-50V_25.pdf, currency=USD, Failure Rate=-, Features=-, Height - Seated (Max)=-, idx=4886, Lead Free Status / RoHS Status="Lead free / ROHS3 Compliant", Lead Spacing=-, Lead Style=-, Length Inch=0.063, Length mm=1.60, Moisture Sensitivity Level (MSL)="1  (Unlimited)", Mounting Type="Surface Mount, MLCC", Packaging="Tape & Reel (TR)", Part Number=CC0603KRX5R7BB475, Part Status=Active, ProductLink=https://www.digikey.com/product-detail/en/yageo/CC0603KRX5R7BB475/311-1785-2-ND/5195193, Series=CC, Size / Dimension="0.063\" L x 0.031\" W (1.60mm x 0.80mm)", Thickness (Max)="0.037\" (0.95mm)", Thickness Inch=0.037, Thickness mm=0.95, Width Inch=0.031, Width mm=0.80
D1 D2 D3 D4: library part 1N4148WS-7-F, "75V 300mA SURFACE MOUNT FAST SWITCHING DIODE", manufacturer="Diodes Inc.", currency=USD, MOQ=3000, Part Number=1N4148WS-7-F, Price=0.02
D11: "Diode Schottky 30V 200mA Surface Mount SOD-523F", Package="S-9 ON Semiconductor", Availability=Unavailable, MF="ON Semiconductor", MP=RB521S30, Price=None, SnapEDA_Link=https://www.snapeda.com/parts/RB521S30/ON%20Semiconductor/view-part/1289104/?ref=snap
J1 J2 J3 J4 J5: "Picoblade Connector, 4 Circuit Single Row, Right Angle Surface Mount SMT PCB", Package=None, Digi-Key_Part_Number=WM7622CT-ND, Digi-Key_Purchase_URL=https://www.digikey.com/product-detail/en/molex/0532610471/WM7622CT-ND/699109?utm_source=snapeda&utm_medium=aggregator&utm_campaign=symbol, MF=Molex, MP=0532610471, SnapEDA_Link=https://www.snapeda.com/parts/0532610471/Molex/view-part/542805/?ref=snap
J6: "USB-A (USB TYPE-A) USB 2.0 Receptacle Connector 4 Position Surface Mount, Right Angle", Package=None, Availability=Unavailable, DigiKey-Purchase-URL=https://snapeda.com/shop?store=DigiKey&id=937545, MF=Samtec, MP=USB-A-S-F-B-SM2, Price=None, SnapEDA_Link=https://www.snapeda.com/parts/USB-A-S-F-B-SM2/Samtec%20Inc./view-part/937545/?ref=snap, Toby_UK-Purchase-URL=https://snapeda.com/shop?store=Toby+UK&id=937545
J8 J9: library part 282841-2, "TERM BLOCK 2POS SIDE ENT 5.08MM", manufacturer="TE Connectivity", currency=USD, Part Number=282841-2, Price=1.7
J10: "0.65 x 2.8 mm, 2.5 A, Horizontal, Surface Mount _SMT_, Dc Power Jack Connector", Package=MSOP-8, Availability=Unavailable, MF="CUI Devices", MP=PJ1-022-SMT-TR, Price=None, SnapEDA_Link=https://www.snapeda.com/parts/PJ1-022-SMT-TR/CUI%20Devices/view-part/491023/?ref=snap
L2: "600 Ohms @ 100MHz 1 Signal Line Ferrite Bead 0603 (1608 Metric) 1A 200mOhm", Package="0603 Wurth Electronics", Availability=Warning, Check_prices=https://www.snapeda.com/parts/742792651/Wurth%20Electronics%20Inc./view-part/445402/?ref=eda, MF="Wurth Electronics", MP=742792651, Price=None, Purchase-URL=https://pricing.snapeda.com/search/part/742792651/?ref=eda, SnapEDA_Link=https://www.snapeda.com/parts/742792651/Wurth%20Electronics%20Inc./view-part/445402/?ref=snap
LED1 LED2: library part KP-1608QBC-D, "1.6 mm x 0.8 mm Blue SMD Top LED", Avnet Part Number=KINKP1608QBCD, Case/Package=1608, Forward Current=20mA, Forward Voltage=3.3V, Lens Colour=Clear, manufacturer=Kingbright, Supplier Part Number 1=2449779, Colour=Blue, ComponentLink1Description=https://datasheet.ciiva.com/8060/1655842-8060422.pdf, ComponentLink1URL=https://datasheet.ciiva.com/8060/1655842-8060422.pdf, ComponentLink2Description=https://datasheet.ciiva.com/41454/001050379-da-01-en-smd-chipled-bl-0603-kp-1608qbc-d-41454603.pdf, ComponentLink2URL=https://datasheet.ciiva.com/41454/001050379-da-01-en-smd-chipled-bl-0603-kp-1608qbc-d-41454603.pdf, currency=EUR, Dominant Wavelength=470nm, Height=1.1mm, Length=0.8mm, Lens Style=Diffused,Colorless,Circular,Rectangular, Luminous Intensity=100mcd, MOQ=2000, Mount="Surface Mount", Number of LEDs=1, Number of Pins=2, Packaging="Tape and Reel", Part Number=KP-1608QBC-D, Price=0.0419, Radiation Hardening=No, REACH SVHC="No SVHC", Stock 1=2000, Supplier 1=Element14, Viewing Angle=120°, Wavelength=465nm, Width=1.6mm
LED3: library part KP-1608CGCK, "1.6 mm x 0.8 mm Green SMD Top LED", Avnet Part Number=KINKPG1608CGKCT, Case/Package=1608, Forward Current=20mA, Forward Voltage=2.1V, Lens Colour=Clear, manufacturer=Kingbright, Colour=Green, ComponentLink1Description=https://datasheet.ciiva.com/8060/1683493-8060417.pdf, ComponentLink1URL=https://datasheet.ciiva.com/8060/1683493-8060417.pdf, ComponentLink2Description=https://datasheet.ciiva.com/20166/72-8670-20166923.pdf, ComponentLink2URL=https://datasheet.ciiva.com/20166/72-8670-20166923.pdf, currency=EUR, Dominant Wavelength=570nm, Height=1.1mm, Length=0.8mm, Lens Style=Diffused,Colorless,Rectangular, Luminous Intensity=50mcd, MOQ=4000, Mount="Surface Mount", Number of LEDs=1, Number of Pins=2, Packaging="Tape and Reel", Part Number=KP-1608CGCK, Price=0.0323, Radiation Hardening=No, REACH SVHC="No SVHC", Stock 1=0, Supplier 1=Element14, Viewing Angle=120°, Wavelength=570nm, Width=1.6mm
LED4: "3.0 mm x 1.0 mm Green Right Angle SMD Chip LED Lamp 120°", Case/Package=SMD/SMT, Colour=Green, Forward Voltage=2.1V, manufacturer=Kingbright, Package Quantity=2000, Part Number=APA3010CGCK, Supplier Part Number 1=754-1063-2-ND, Test Current=20mA, Dominant Wavelength=570nm, Height=1mm, Lead Free="Lead Free", Length=3mm, Lens Style=Clear, Luminous Intensity=60mcd, Mount="Surface Mount", Packaging="Tape and Reel", Pricing 1="2000=0.1155 (USD)", Stock 1=0, Supplier 1=Digi-Key, Viewing Angle=120°, Width=2mm
LED5 LED6: library part KP-1608SECK, "1.6 mm x 0.8 mm Orange SMD Top LED", Avnet Part Number=KINKPG1608SEKCT, Case/Package=1608, Forward Current=30mA, Forward Voltage=2.1V, Lens Colour=Clear, manufacturer=Kingbright, Power Dissipation=75mW, Supplier Part Number 1=8529850RL, Colour=Orange, ComponentLink1Description=https://datasheet.ciiva.com/8060/1655842-8060422.pdf, ComponentLink1URL=https://datasheet.ciiva.com/8060/1655842-8060422.pdf, ComponentLink2Description=https://datasheet.ciiva.com/41454/001050379-da-01-en-smd-chipled-bl-0603-kp-1608qbc-d-41454603.pdf, ComponentLink2URL=https://datasheet.ciiva.com/41454/001050379-da-01-en-smd-chipled-bl-0603-kp-1608qbc-d-41454603.pdf, ComponentLink3Description=https://datasheet.ciiva.com/8060/1701685-8060423.pdf, ComponentLink3URL=https://datasheet.ciiva.com/8060/1701685-8060423.pdf, ComponentLink4Description=https://datasheet.ciiva.com/20166/72-4726-20166919.pdf, ComponentLink4URL=https://datasheet.ciiva.com/20166/72-4726-20166919.pdf, ComponentLink5Description=https://datasheet.ciiva.com/20166/72-4730-20166961.pdf, ComponentLink5URL=https://datasheet.ciiva.com/20166/72-4730-20166961.pdf, ComponentLink6Description=https://datasheet.ciiva.com/8060/1701685-8060424.pdf, ComponentLink6URL=https://datasheet.ciiva.com/8060/1701685-8060424.pdf, ComponentLink7Description=https://datasheet.ciiva.com/46397/1701685-46397813.pdf, ComponentLink7URL=https://datasheet.ciiva.com/46397/1701685-46397813.pdf, currency=EUR, Dominant Wavelength=601nm, Height=1.1mm, Length=0.8mm, Lens Style=Diffused,Colorless,Rectangular, Luminous Intensity=250mcd, MOQ=2000, Number of LEDs=1, Number of Pins=2, Packaging="Cut Tape", Part Number=KP-1608SECK, Price=0.0296, Radiation Hardening=No, REACH SVHC="No SVHC", Stock 1=0, Supplier 1=Element14, Viewing Angle=120°, Wavelength=601nm, Width=1.6mm
P1 P2 P3 P5: "Header, 2-Pin", LatestRevisionDate=17-Jul-2002, LatestRevisionNote="Re-released for DXP Platform.", Publisher="Altium Limited"
R1 R4: library part 9C06031A1000FKHFT, "RES 100 OHM 1/10W 1% 0603 SMD", Case="0603 (1608 metric)", Display Value=100, manufacturer=Yageo, Rated Power="0.1W, 1/10W", Temperature Coefficient=±100ppm/°C, Tolerance=±1%, Value Unit=1, category_id=33, composition="Thick Film", currency=USD, datasheet=http://www.yageo.com/pdf/Pu-RC0603_51_PbFree_L_2.pdf, Digikey PN=311-100HTR-ND, Features=-, Height="0.018\" (0.45mm)", image=http://media.digikey.com/Photos/NoPhoto/NoPhoto_TMB.jpg, lead_style="Surface Mount (SMD - SMT)", MOQ=5.000, Normalized Value=100, Packaging="Tape & Reel (TR)", Part Number=9C06031A1000FKHFT, Price=Call, quantity_available=0Note, Series=RC0603, Size Dimension="0.063\" L x 0.031\" W (1.60mm x 0.80mm)", smt_res_0603id=202386, sub_category_id=619, Value_in_ohm=100
R2 R3: library part RC0603FR-07150RL, "RES 150 OHM 1/10W 1% 0603 SMD", Case="0603 (1608 metric)", Display Value=150, manufacturer=Yageo, Rated Power="0.1W, 1/10W", Temperature Coefficient=±100ppm/°C, Tolerance=±1%, Value Unit=1, category_id=33, composition="Thick Film", currency=USD, datasheet=http://www.yageo.com/pdf/Pu-RC0603_51_PbFree_L_2.pdf, Digikey PN=311-150HRTR-ND, Features=-, Height="0.018\" (0.45mm)", image=http://media.digikey.com/Renders/Yageo%20Renders/RC0603FR-0710RL_tmb.jpg, lead_style="Surface Mount (SMD - SMT)", MOQ=5.000, Normalized Value=150, Packaging="Tape & Reel (TR)", Part Number=RC0603FR-07150RL, Price=0.00270, quantity_available="970,000Note / Alternate Packaging", Series=RC0603, Size Dimension="0.063\" L x 0.031\" W (1.60mm x 0.80mm)", smt_res_0603id=72883, sub_category_id=619, Value_in_ohm=150
R5 R8 R9 R13: library part RT0603BRE07270RL, "RES 270 OHM 1/10W .1% SMD 0603", Case="0603 (1608 metric)", Display Value=270, manufacturer=Yageo, Rated Power="0.1W, 1/10W", Temperature Coefficient=±50ppm/°C, Tolerance=±0.1%, Value Unit=1, category_id=33, composition="Thin Film", currency=USD, datasheet=http://www.yageo.com/pdf/PYu-RT_1-to-0.05_RoHS_L_3.pdf, Digikey PN=RT0603BRE07270RL-ND, Features=-, Height="0.018\" (0.45mm)", image=http://media.digikey.com/Renders/Yageo%20Renders/RC0603FR-0710RL_tmb.jpg, lead_style="Surface Mount (SMD - SMT)", MOQ=5.000, Normalized Value=270, Packaging="Tape & Reel (TR)", Part Number=RT0603BRE07270RL, Price=0.11300, quantity_available=0, Series=RT, Size Dimension="0.063\" L x 0.031\" W (1.60mm x 0.80mm)", smt_res_0603id=163901, sub_category_id=619, Value_in_ohm=270
R6 R7: library part RT0603DRE07100KL, "RES 100K OHM 1/10W .5% SMD 0603", Case="0603 (1608 metric)", Display Value=100K, manufacturer=Yageo, Normalized Value=100, Rated Power="0.1W, 1/10W", Temperature Coefficient=±50ppm/°C, Tolerance=±0.5%, Value_in_ohm=100000, Value Unit=1000, category_id=33, composition="Thin Film", currency=USD, datasheet=http://www.yageo.com/pdf/PYu-RT_1-to-0.05_RoHS_L_3.pdf, Digikey PN=RT0603DRE07100KL-ND, Features=-, Height="0.018\" (0.45mm)", image=http://media.digikey.com/Renders/Yageo%20Renders/RC0603FR-0710RL_tmb.jpg, lead_style="Surface Mount (SMD - SMT)", MOQ=15.000, Packaging="Tape & Reel (TR)", Part Number=RT0603DRE07100KL, Price=0.01200, quantity_available=5,000, Series=RT, Size Dimension="0.063\" L x 0.031\" W (1.60mm x 0.80mm)", smt_res_0603id=67727, sub_category_id=619
R10 R11 R17 R18: library part RL0603FR-070R15L, "RES .15 OHM 1/10W 1% 0603 SMD", Case="0603 (1608 metric)", Display Value=150m, manufacturer=Yageo, Normalized Value=0.15, Rated Power="0.1W, 1/10W", Temperature Coefficient=±800ppm/°C, Tolerance=±1%, Value Unit=1, category_id=33, composition="Thick Film", currency=USD, datasheet=http://www.yageo.com/pdf/Pu-RL_51_PbFree_L_1.pdf, Digikey PN=311-.15QTR-ND, Features=-, Height="0.018\" (0.45mm)", image=http://media.digikey.com/Renders/Yageo%20Renders/RC0603FR-0710RL_tmb.jpg, lead_style="Surface Mount (SMD - SMT)", MOQ=5.000, Packaging="Tape & Reel (TR)", Part Number=RL0603FR-070R15L, Price=0.12700, quantity_available="15,000Note / Alternate Packaging", Series=RL, Size Dimension="0.063\" L x 0.031\" W (1.60mm x 0.80mm)", smt_res_0603id=43191, sub_category_id=619, Value_in_ohm=0.15
R12: library part RC0603FR-07130RL, "RES 130 OHM 1/10W 1% 0603 SMD", Case="0603 (1608 metric)", Display Value=130, manufacturer=Yageo, Rated Power="0.1W, 1/10W", Temperature Coefficient=±100ppm/°C, Tolerance=±1%, Value Unit=1, category_id=33, composition="Thick Film", currency=USD, datasheet=http://www.yageo.com/pdf/Pu-RC0603_51_PbFree_L_2.pdf, Digikey PN=311-130HRTR-ND, Features=-, Height="0.018\" (0.45mm)", image=http://media.digikey.com/Renders/Yageo%20Renders/RC0603FR-0710RL_tmb.jpg, lead_style="Surface Mount (SMD - SMT)", MOQ=5.000, Normalized Value=130, Packaging="Tape & Reel (TR)", Part Number=RC0603FR-07130RL, Price=0.00270, quantity_available="0Note / Alternate Packaging", Series=RC0603, Size Dimension="0.063\" L x 0.031\" W (1.60mm x 0.80mm)", smt_res_0603id=142960, sub_category_id=619, Value_in_ohm=130
R15 R16: library part RC0603FR-071K6L, "RES 1.60K OHM 1/10W 1% 0603 SMD", Case="0603 (1608 metric)", Display Value=1.6K, manufacturer=Yageo, Normalized Value=1.6, Rated Power="0.1W, 1/10W", Temperature Coefficient=±100ppm/°C, Tolerance=±1%, Value_in_ohm=1600, Value Unit=1000, category_id=33, composition="Thick Film", currency=USD, datasheet=http://www.yageo.com/pdf/Pu-RC0603_51_PbFree_L_2.pdf, Digikey PN=311-1.60KHRTR-ND, Features=-, Height="0.018\" (0.45mm)", image=http://media.digikey.com/Renders/Yageo%20Renders/RC0603FR-0710RL_tmb.jpg, lead_style="Surface Mount (SMD - SMT)", MOQ=5.000, Packaging="Tape & Reel (TR)", Part Number=RC0603FR-071K6L, Price=0.00270, quantity_available="0Note / Alternate Packaging", Series=RC0603, Size Dimension="0.063\" L x 0.031\" W (1.60mm x 0.80mm)", smt_res_0603id=73222, sub_category_id=619
SW1: "Switch Push Button OFF _ON_ SPST Round Button 0.05A 24VDC Momentary Contact PC Pins Thru-Hole", Package=None, Availability=Unavailable, EU_RoHS_Compliance=Compliant, MF="TE Connectivity", MP=3-1825910-1, Price=None, SnapEDA_Link=https://www.snapeda.com/parts/3-1825910-1/TE%20Connectivity%20ALCOSWITCH%20Switches/view-part/452461/?ref=snap, TE_purchase_URL=https://www.te.com/usa-en/product-3-1825910-1.html?te_bu=Cor&te_type=disp&te_campaign=seda_glo_cor-seda-global-disp-prtnr-fy19-seda-model-bom-cta_sma-317_1&elqCampaignId=32493
U1 U2: "L6205N DIP Half H-Bridge Driver _Internal FET_ Power Management Evaluation Board", Package="DIP-20 STMicroelectronics", Availability=Unavailable, MF=STMicroelectronics, MP=L6205N, Price=None, SnapEDA_Link=https://www.snapeda.com/parts/L6205N/STMicroelectronics/view-part/41353/?ref=snap
U3: "USB Bridge, USB to UART USB 2.0 UART Interface 28-SSOP", Package="SSOP-28 FTDI", Check_prices=https://www.snapeda.com/parts/FT232RL-REEL/FTDI,%20Future%20Technology%20Devices%20International%20Ltd/view-part/45427/?ref=eda, Digi-Key_Part_Number=768-1007-1-ND, MF=FTDI,, MP=FT232RL-REEL, Purchase-URL=https://pricing.snapeda.com/search/part/FT232RL-REEL/?ref=eda, SnapEDA_Link=https://www.snapeda.com/parts/FT232RL-REEL/FTDI,%20Future%20Technology%20Devices%20International%20Ltd/view-part/45427/?ref=snap
U4: "8-bit AVR Microcontroller, 128KB Flash, 4KB EEPROM, 4KB SRAM, 64-pin TQFP, Industrial Grade (-40°C to 85°C)", Supplier Part Number 1=ATMEGA128A-AU-ND, Code_JEDEC=MS-026-AEB, ComponentLink1Description="Manufacturer Link", ComponentLink1URL=http://www.atmel.com/products/avr/default.asp?, ComponentLink2Description="ATmega128A Datasheet", ComponentLink2URL=http://www.atmel.com/dyn/resources/prod_documents/doc8151.pdf, ComponentLink3Description="ATmega128A Summary", ComponentLink3URL=http://www.atmel.com/dyn/resources/prod_documents/8151S.pdf, ComponentLink4Description="Atmel.com Home", ComponentLink4URL=http://www.atmel.com, DatasheetVersion="revE, Feb-2010", PackageDescription="64-Pin Plastic Thin Profile Quad Flat Pack, 14 x 14 x 1.0 mm Body, 0.8 mm Pitch (TQFP)", PackageReference=64A, PackageVersion="revB, Oct-2001", Published=1-Apr-2010, Publisher="Altium Limited", Supplier 1=Digi-Key, Supplier 2=Farnell, Supplier 3=Mouser, Supplier Part Number 2=1773397, Supplier Part Number 3=556-ATMEGA128A-AU
U5: "SIMPLE SWITCHER&reg; 4.5V to 40V, 3A Low Component Count Step-Down Regulator 5-DDPAK/TO-263", Package="TO-263-5 Texas Instruments", Availability=Good, DigiKey-Purchase-URL=https://snapeda.com/shop?store=DigiKey&id=15588, MF="Texas Instruments", Mouser-Purchase-URL=https://snapeda.com/shop?store=Mouser&id=15588, MP=LM2596S-5.0/NOPB, Price=None, SnapEDA_Link=https://www.snapeda.com/parts/LM2596S-5.0/NOPB/Texas%20Instruments/view-part/15588/?ref=snap, Texas_Instruments-Purchase-URL=https://snapeda.com/shop?store=Texas+Instruments&id=15588
L1: Code_IEC=1005, Code_JEITA=0402, LatestRevisionDate=29-May-2009, LatestRevisionNote="IPC-7351 Footprint Added.", PackageDescription="Chip Inductor", PackageReference=0402-A, Published=8-Jun-2000, Publisher="Altium Limited"

## Free pads (board coordinates)
  round 1.524 hole 3.2: 7(126.111,35.941) 8(103.124,119.38) 9(34.798,69.469)

## Via types
v1: diameter 0.8, hole 0.4, Component Side to Solder Side, 72 vias
v2: diameter 1.27, hole 0.711, Component Side to Solder Side, 4 vias

## Nets (pads, with @x,y where several pads share a name; then routed paths per layer and width w, separated by ;. In a path a pad name is that pad's centre, name@x,y a point inside that pad or via, vN(x,y) a via of type N, cw(c..) or ccw(c..) an arc to the next point about the centre after c; other vN are vias at no path point)
+5V: C1.2 C2.2 C3.2 C14.1 J1.1 J2.1 J3.1 J4.1 J5.1 J7.1 L1.2 LED3.2 LED5.2 LED6.2 P2.2 R8.2 R12.2 R15.2 R16.2 TP6.1 U4.21 U4.52 U4.64 U5.4 | length 112.1
  Component Side w0.254: R8.2 31.572,103.825 31.572,102.184 30.861,101.473 30.861,97.282 32.639,95.504 46.355,95.504 47.879,97.028 47.879,100.157 51.181,103.459 51.181,105.697 50.387,106.491 50.337,106.491 50.214,106.614 L1.2 U5.4@50.214,108.331 ; U5.4 U5.4@50.214,108.331 ; P2.2 55.045,121.339 55.045,108.258 53.975,107.188 51.357,107.188 U5.4@50.214,108.331 ; P2.2@57.34,123.634 61.214,119.761 TP6.1 ; C14.1 61.214,111.346 v1(61.214,114.681) ; LED3.2 v1(63.754,86.734) ; v1(72.594,118.364) 72.634,118.404 J2.1 ; J7.1 75.184,108.825 v1(75.184,112.026) ; v1(77.47,83.058) 76.962,83.566 C2.2 77.826,84.591 78.548,85.313 U4.64 ; C1.2 78.32,95.214 78.621,94.913 U4.52 81.485,94.913 v1(81.513,94.884) ; v1(84.415,118.364) J1.1 ; U4.21 95.607,88.513 96.077,88.043 C3.2 101.127,88.043 101.35,87.82 101.35,87.72 101.994,87.076 101.994,86.496 R12.2 ; v1(96.216,118.364) J5.1 ; v1(105.664,124.714) 105.678,124.7 LED5.2 LED6.2 ; v1(116.332,89.937) R15.2 ; R16.2 v1(116.332,97.663) ; v1(128.651,79.649) J3.1 ; v1(128.651,91.841) J4.1
  other v1: 92.71,88.466
+12V: C15.1 C17.1 P1.2 SW1.3 SW1.4 TP5.1 U5.1 | length 54.7
  Component Side w1: P1.2 30.935,124.206 31.661,124.932 SW1.4 SW1.3 42.037,123.154 42.037,116.117 45.114,113.04 U5.1 42.372,109.809 41.656,109.093 TP5.1 41.656,103.696 43.752,101.6 C17.1 33.972,98.933 C15.1
ADC_IRL: J1.2 U4.60 | length 36.6
  Component Side w0.254: v1(77.362,88.476) 77.366,88.481 79.694,88.481 U4.60 ; v1(77.47,98.044) 77.47,99.993 83.165,105.688 J1.2
  Solder Side w0.254: v1(77.362,88.476) 77.362,90.399 77.47,90.507 v1(77.47,98.044)
ADC_IRR: J2.2 U4.61 | length 39.8
  Component Side w0.254: J2.2 71.384,117.612 77.47,111.526 77.47,101.207 76.073,99.81 v1(76.073,97.79) ; v1(76.385,87.362) 78.283,87.362 78.634,87.713 U4.61
  Solder Side w0.254: v1(76.073,97.79) 76.073,97.642 75.819,97.388 75.819,90.399 76.385,89.833 v1(76.385,87.362)
GND: C1.1 C2.1 C3.1 C4.2 C8.2 C12.1 C13.1 C14.2 C15.2 C16.1 C17.2 C18.1 C19.1 C20.1 C21.1 C22.1 D11.2 J1.4 J1.S1 J1.S2 J2.4 J2.S1 J2.S2 J3.4 J3.S1 J3.S2 J4.4 J4.S1 J4.S2 J5.4 J5.S1 J5.S2 J6.04 J6.S1 J6.S2 J7.5 J10.2 J10.3 LED4.1 P1.1 P2.1 P3.1 P5.1 pad.7 pad.8 pad.9 R2.1 R3.1 R5.1 R11.1 R18.1 Swch1.3 Swch1.4 TP7.1 TP8.1 U1.5 U1.6 U1.15 U1.16 U2.5 U2.6 U2.15 U2.16 U3.7 U3.18 U3.21 U3.25 U3.26 U4.22 U4.53 U4.62 U4.63 U5.3 U5.5 U5.6 | length 218.2
  Component Side w0.254: P1.1 27.686,118.745 30.005,116.426 J10.3 35.385,115.426 35.962,115.426 35.962,112.33 35.385,111.753 J10.2 ; LED4.1 34.659,107.414 35.385,108.14 J10.2 ; R3.1 v1(33.655,74.952) ; R2.1 v1(33.655,80.742) ; v1(33.909,87.376) C15.2 ; v1(38.862,109.093) 35.418,109.093 J10.2 ; D11.2 v1(45.678,106.664) ; v1(48.514,106.341) U5.3 ; U5.6 48.528,120.545 48.528,116.426 v1(51.914,113.04) U5.5 ; C17.2 v1(55.372,98.933) ; v1(61.056,100.157) C14.2 ; R5.1 v1(66.713,86.734) ; R18.1 v1(68.453,27.267) ; C12.1 68.062,62.863 68.314,62.611 v1(69.215,62.611) ; C13.1 69.961,41.291 v1(69.977,41.275) ; v1(68.844,118.364) 68.884,118.404 J2.4 67.183,120.269 66.334,121.118 J2.S2 J2.S1 J1.S2 J1.S1 89.895,123.169 J5.S2 J5.S1 ; J7.5 v1(70.054,112.026) ; v1(75.693,85.99) C2.1 77.084,86.113 U4.63 U4.62 ; v1(77.089,31.623) TP7.1 ; C1.1@77.481,93.698 C1.1 78.505,93.814 78.755,94.064 79.677,94.064 U4.53 79.757,94.082 80.715,94.082 v1(81.485,93.313) ; v1(80.665,118.364) J1.4 ; v1(89.662,104.395) v1(89.662,104.395) TP8.1 ; v1(92.466,118.364) J5.4 ; v1(92.757,89.662) 93.091,89.662 93.44,89.313 U4.22 98.425,89.313 98.555,89.443 C3.1 ; v1(99.822,111.698) 99.822,110.49 100.33,109.982 C21.1 ; v1(102.899,107.613) 103.307,108.021 U3.7 ; v1(111.633,87.713) C20.1 ; U3.18 114.412,105.421 C16.1 115.088,105.436 115.254,105.602 C22.1 116.418,106.721 v1(116.459,106.68) ; U3.21 112.895,107.371 114.3,108.776 v1(114.3,110.236) 113.915,110.621 U3.26@112.203,110.621 ; U3.25@112.203,109.971 114.035,109.971 v1@114.109,110.045 ; v1(113.03,87.713) C19.1 ; v1(118.618,118.491) 118.618,115.483 J6.S2 122.809,114.478 123.373,113.914 J6.04 125.623,114.478 J6.S1 ; v1(128.905,96.774) 128.905,96.012 129.326,95.591 J4.4 131.786,95.591 133.456,97.261 J4.S2 ; J3.4 131.786,83.399 133.456,85.069 J4.S1 ; C18.1 v1(134.123,108.966) ; J3.S1 J3.S1@133.456,77.226
  Component Side w1: v1(52.743,67.729) v1(54.013,67.729) v1(55.283,67.729) v1(56.642,67.729) 59.144,67.729 ; R11.1 65.187,50.356 v1(65.187,51.689) ; C8.2 89.441,44.483 91.821,46.863 v1(91.948,46.863) ; C4.2 101.252,44.61 101.6,44.958 v1(104.394,44.958)
NetC4_1: C4.1 D1.1 P3.2 U1.14 U1.17 | length 21.2
  Component Side w1: U1.17 53.848,59.69 56.896,59.69 U1.14 59.182,64.513 59.144,64.551 59.144,66.129 60.795,66.129 61.25,66.584 D1.1@63.246,66.584 ; v1(92.576,42.926) C4.1
NetC5_1: C5.1 R1.2 | length 4.1
  Component Side w1: R1.2 46.444,65.762 C5.1
NetC5_2: C5.2 U1.19 | length 2.3
  Component Side w0.8: U1.19 C5.2
NetC7_1: D2.2 U1.12 | length 14
  Component Side w1: 60.744,64.551 61.687,64.551 U1.12 65.187,62.901 D2.2
NetC8_1: C8.1 D3.1 P5.2 U2.14 U2.17 | length 24.3
  Component Side w1: 52.009,45.23 52.009,41.933 52.032,41.91 52.032,38.819 51.882,38.669 U2.17 53.975,36.576 57.531,36.576 U2.14 59.563,40.35 60.742,41.529 60.742,42.541 D3.1 ; v1(80.899,42.926) C8.1
NetC9_1: R4.2 | length 5.2
  Component Side w1: 46.814,43.753 46.814,46.687 47.607,47.48 R4.2
NetC9_2: U2.19 | length 3.8
  Component Side w1: 46.814,42.353 46.814,38.813 46.736,38.735 U2.19
NetC11_1: D4.2 U2.12 | length 14
  Component Side w1: D4.2@57.912,47.48 60.47,47.48 62.142,45.808 62.142,41.529 63.5,41.529 64.643,40.386 U2.12
NetC16_2: C16.2 U3.17 | length 2.3
  Component Side w0.254: U3.17@112.203,104.771 114.322,104.771 C16.2
NetC18_2: C18.2 J6.01 L2.2 | length 5.4
  Component Side w0.254: C18.2 130.364,107.013 L2.2 ; C18.2@130.373,109.084 J6.01
NetC19_2: C19.2 U4.24 XTAL1.2 | length 19.3
  Component Side w0.254: U4.24 95.03,90.909 108.574,90.909 XTAL1.2 112.153,91.047 113.03,90.17 C19.2
NetC20_2: C20.2 U4.23 XTAL1.1 | length 16.9
  Component Side w0.254: U4.23 108.146,90.113 XTAL1.1 111.4,89.547 C20.2
NetD1_2: D1.2 D2.1 R1.1 | length 21.6
  Component Side w1: R1.1 60.198,69.85 61.214,68.834 63.307,68.834 63.307,72.578 64.069,73.34 D2.1@65.187,73.34
NetD3_2: D3.2 D4.1 R4.1 | length 10.4
  Component Side w1: R4.1@50.407,47.48 52.959,47.48 55.485,47.48 D4.1 D3.2@57.912,43.212
NetD11_1: D11.1 L1.1 U5.2 | length 7.5
  Component Side w0.254: D11.1 L1.1 ; D11.1@46.814,105.713 U5.2
NetJ8_1: J8.1 U1.4 U1.18 | length 27.4
  Component Side w1: J8.1 38.227,61.087 40.132,59.182 46.228,59.182 U1.18 49.022,58.801 51.562,56.261 U1.4
NetJ8_2: J8.2 U1.7 U1.13 | length 40.7
  Solder Side w1: J8.2 37.846,50.419 57.15,50.419 59.182,52.451 U1.7 59.182,57.277 61.722,59.817 U1.13
NetJ9_1: J9.1 U2.4 U2.18 | length 27.3
  Component Side w1: J9.1 42.672,37.719 44.069,36.322 47.117,36.322 U2.18 51.943,36.068 U2.4
NetJ9_2: J9.2 U2.7 U2.13 | length 36.7
  Solder Side w1: J9.2 57.912,32.639 U2.7 59.563,34.163 62.103,36.703 U2.13
NetJ10_1: J10.1 SW1.1 | length 8.6
  Component Side w1: J10.1 38.385,113.026 38.885,113.526 39.142,113.526 40.409,114.793 SW1.1
NetLED1_1: LED1.1 R2.2 | length 3.6
  Component Side w0.254: LED1.1 27.319,80.107 27.954,80.742 R2.2
NetLED1_2: LED1.2 U4.2 | length 55.9
  Component Side w0.254: LED1.2 35.56,78.867 38.481,81.788 81.661,81.788 82.176,82.303 U4.2
NetLED2_1: LED2.1 R3.2 | length 3.9
  Component Side w0.254: LED2.1 27.319,75.7 28.067,74.952 R3.2
NetLED2_2: LED2.2 U4.3 | length 57.8
  Component Side w0.254: LED2.2 29.07,77.216 35.59,77.216 38.765,80.391 81.725,80.391 82.976,81.642 U4.3
NetLED3_1: LED3.1 R5.2 | length 3.4
  Component Side w0.254: LED3.1 65.092,84.984 R5.2
NetLED4_2: LED4.2 R8.1
NetLED5_1: LED5.1 R9.2 | length 3.5
  Component Side w0.254: R9.2 107.465,122.873 LED5.1@107.592,123
NetLED6_1: LED6.1 R13.2 | length 3.4
  Component Side w0.254: R13.2 LED6.1
NetR6_2: R6.2 U4.6 | length 26.2
  Component Side w0.254: R6.2 69.755,65.405 85.376,81.026 U4.6
NetR7_2: R7.2 U4.7 | length 48.1
  Component Side w0.254: R7.2@68.695,43.053 69.088,43.053 69.977,43.942 69.977,64.643 86.176,80.842 U4.7
NetR9_1: R9.1 U3.22 | length 13.3
  Component Side w0.254: R9.1 107.465,110.157 109.601,108.021 U3.22
NetR10_1: R10.1 R11.2 | length 1.9
  Component Side w1: R10.1 63.307,50.508 R11.2
NetR10_2: R10.2 TP2.1 U1.3 U1.8 U4.58 | length 73.2
  Component Side w0.254: v1(73.844,88.957) 75,90.113 U4.58
  Component Side w1: U1.3 51.27,52.108 R10.2@61.418,52.108 ; TP2.1 59.856,50.546 R10.2@61.418,52.108 ; U1.8 61.722,52.143 R10.2 R10.2@61.418,52.108
  Solder Side w0.254: U1.8 63.696,52.382 68.638,52.382 73.844,57.588 v1(73.844,88.957)
NetR13_1: R13.1 U3.23 | length 11
  Component Side w0.254: R13.1 110.109,109.052 110.49,108.671 U3.23
NetR17_1: R17.1 R18.2 | length 3.2
  Component Side w1: R17.1 R18.2
NetR17_2: R17.2 TP4.1 U2.3 U2.8 U4.59 | length 98.8
  Component Side w0.254: v1(74.786,87.886) 76.212,89.313 U4.59
  Component Side w1: U2.3 49.403,28.321 51.308,26.416 58.293,26.416 60.833,28.956 62.053,28.956 62.103,28.906 U2.8 ; R17.2 70.955,28.867 TP4.1
  Solder Side w0.254: U2.8 62.103,32.385 65.659,35.941 70.612,35.941 74.786,40.115 v1(74.786,87.886)
NetU1_1: U1.1 U1.9 U4.51 | length 77.8